# Altium PCB 400432.PcbDoc (part 1 of 7)
Units mm, origin at the board's own origin, x right, y up, seen from the top; angles counter-clockwise.
Board outline 136.53 x 63.5 mm, 4 copper layers (Top Layer, Mid-Layer 1, Mid-Layer 2, Bottom Layer), stack 1.505 mm thick; 354 components, 245 nets, 1470 pads, 1957 vias.
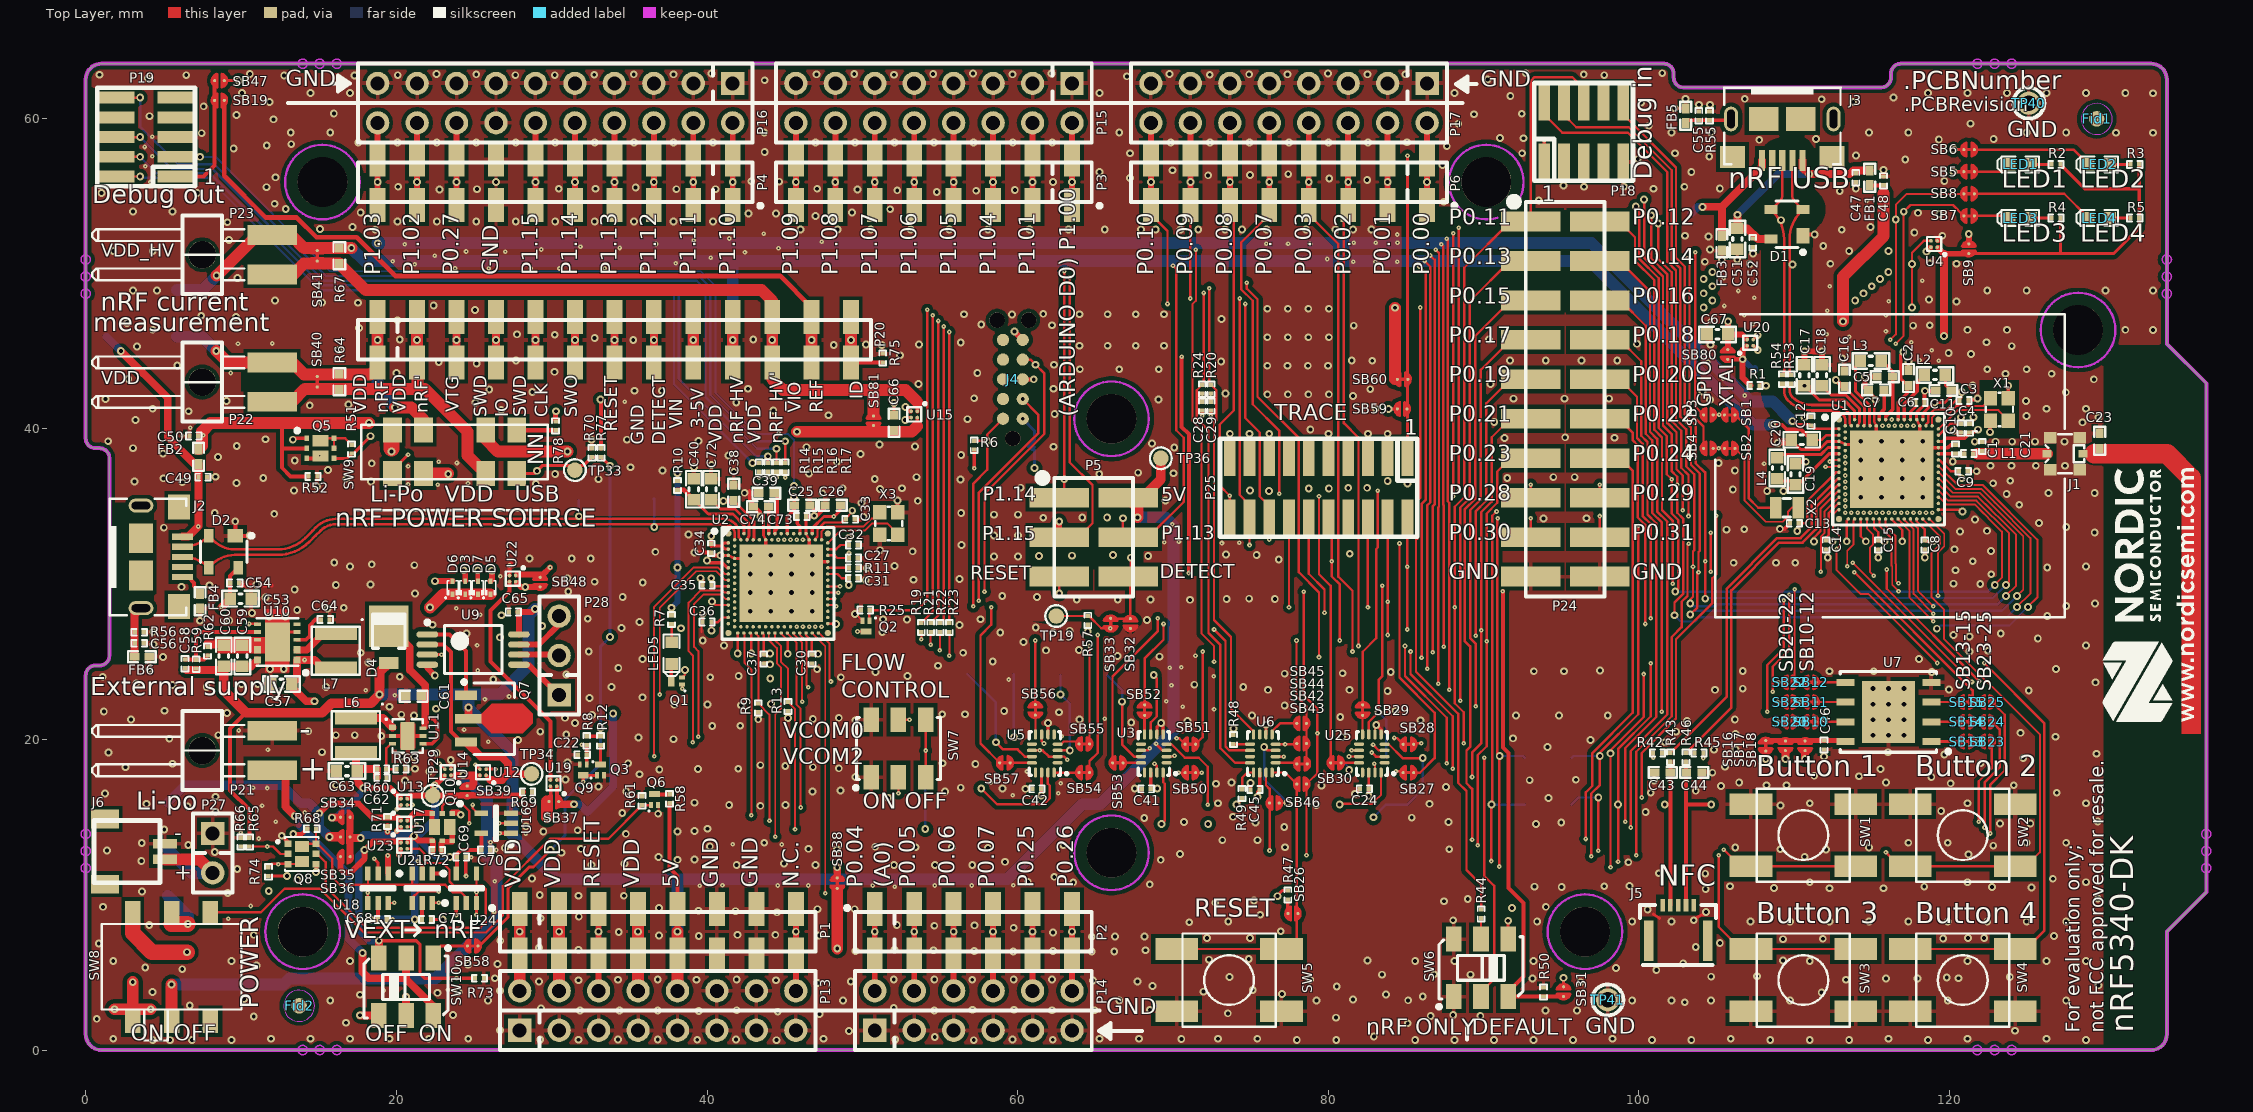
[diagram p0: Top Layer view]
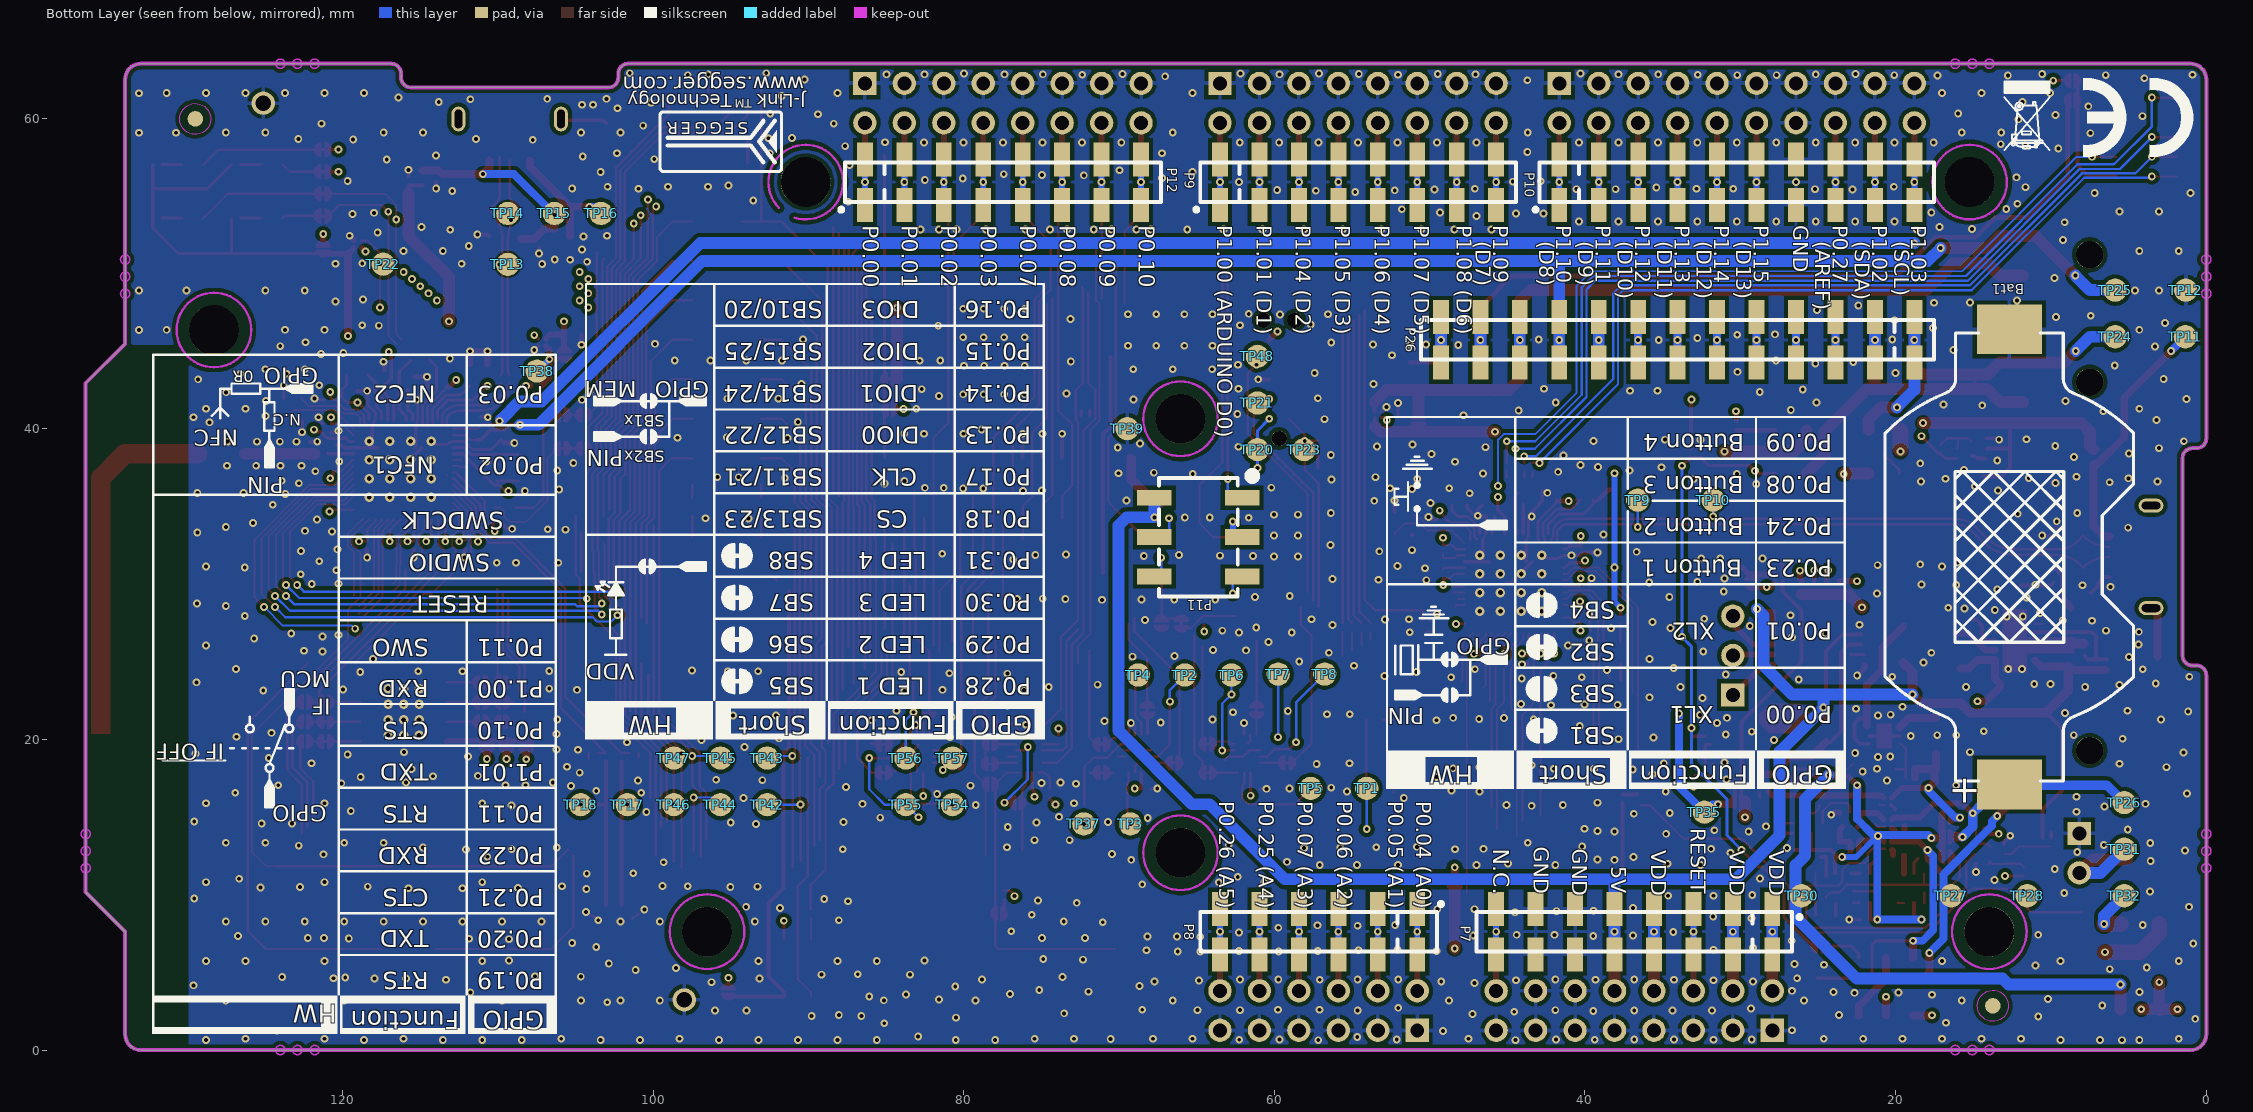
[diagram p1: Bottom Layer view, seen from below]
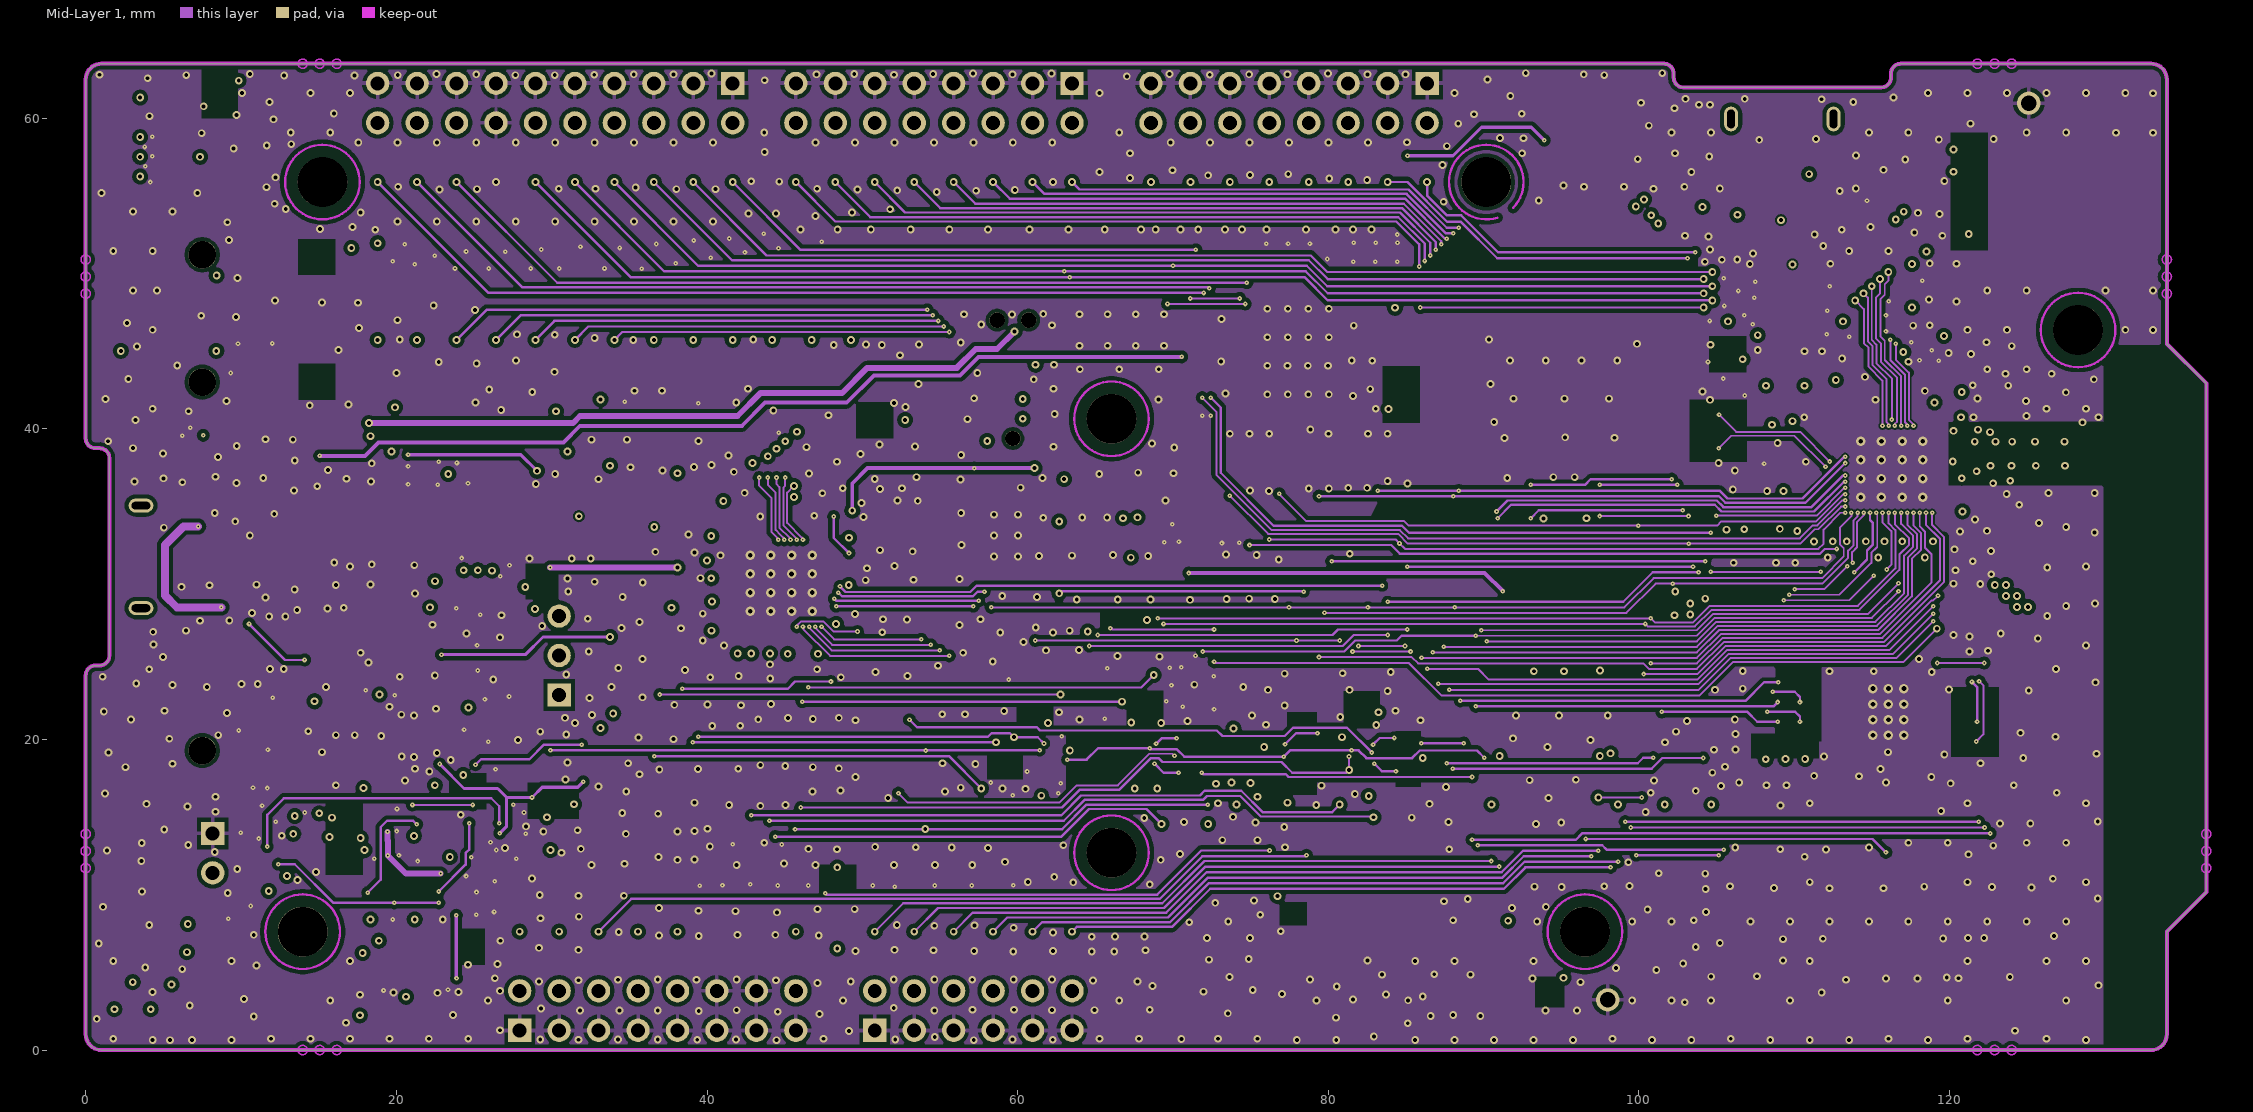
[diagram p2: Mid-Layer 1]
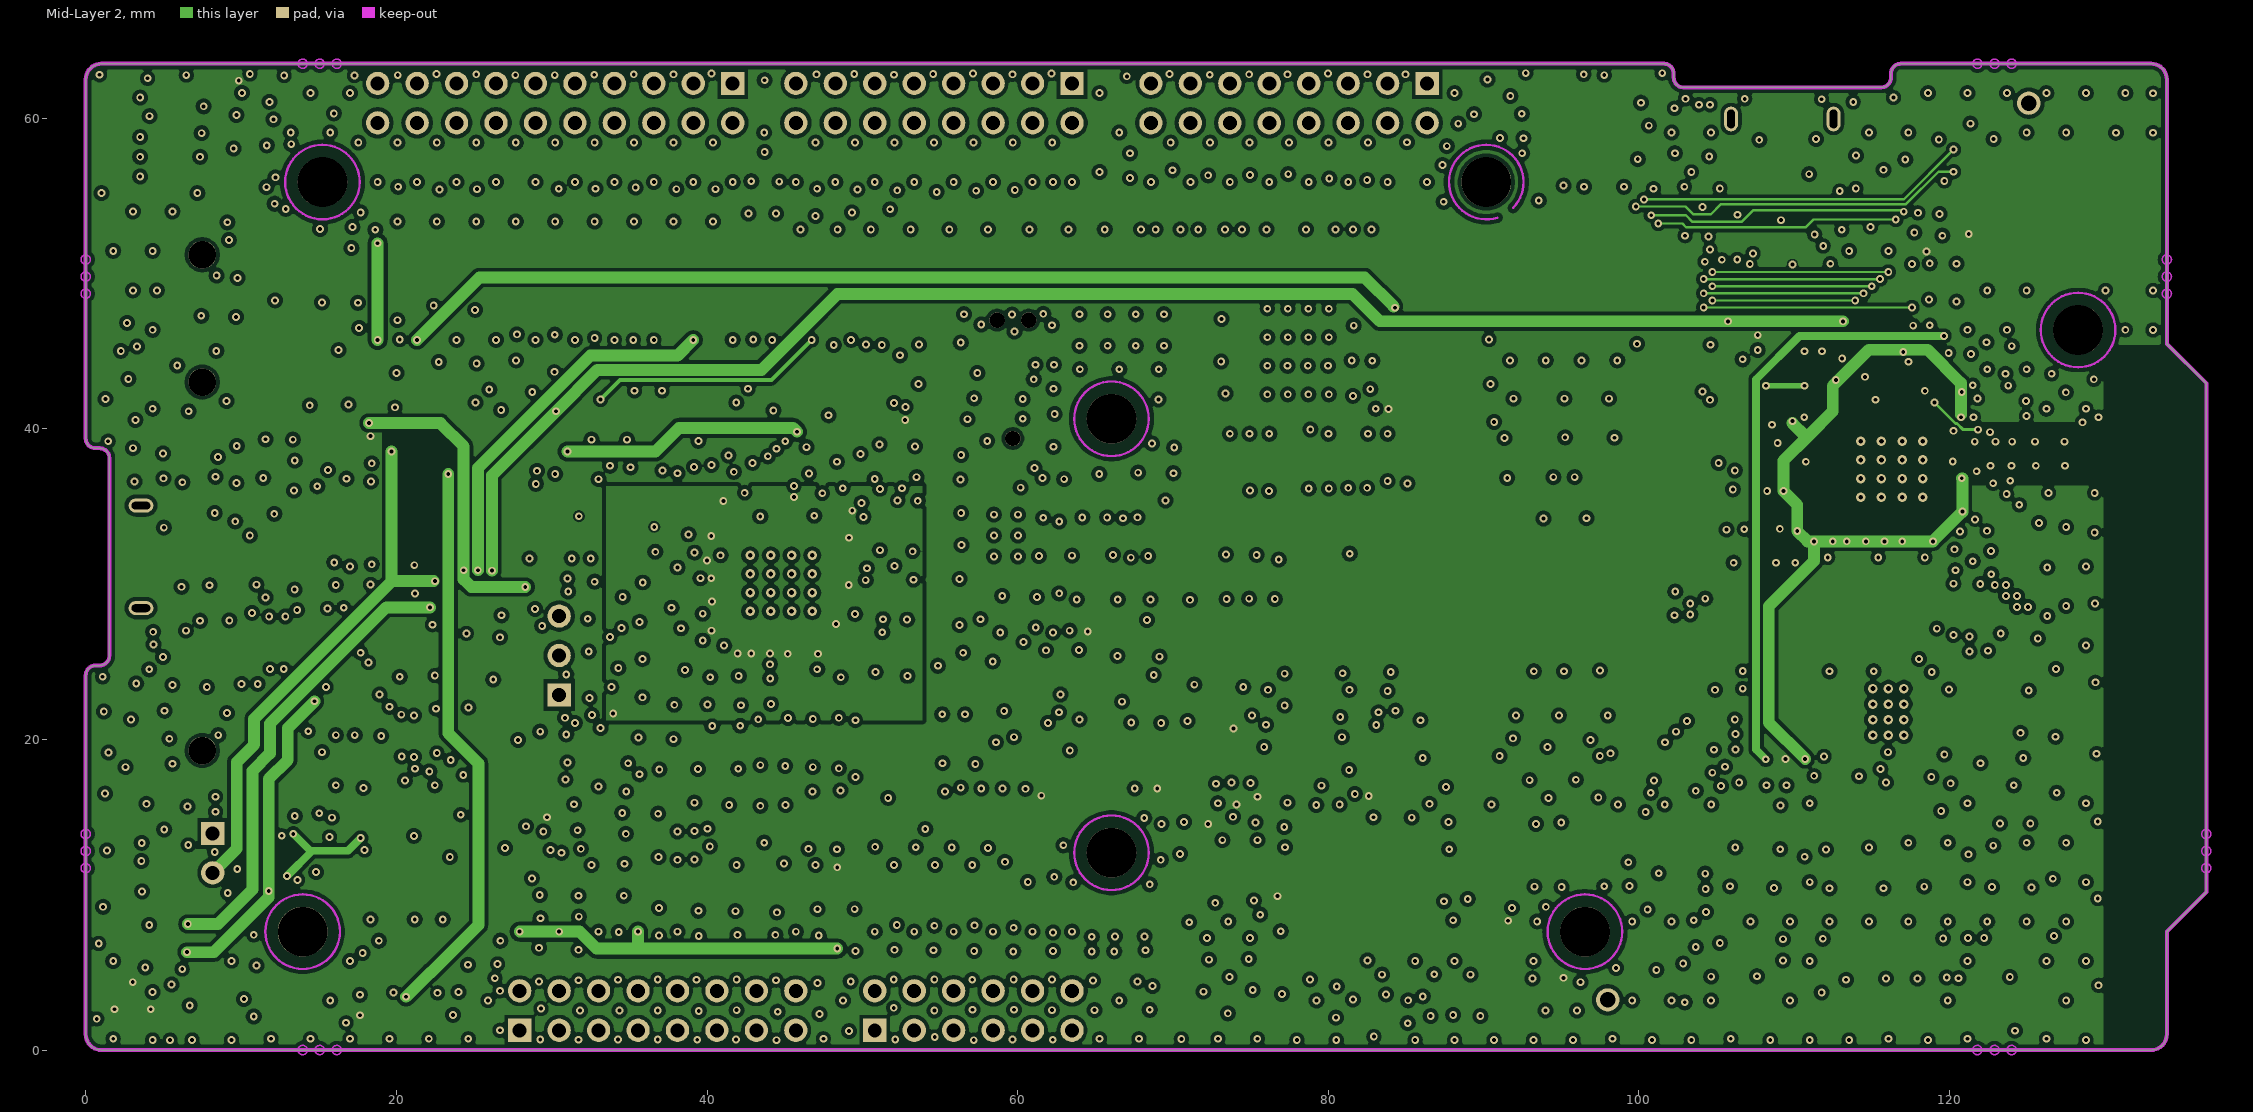
[diagram p3: Mid-Layer 2]
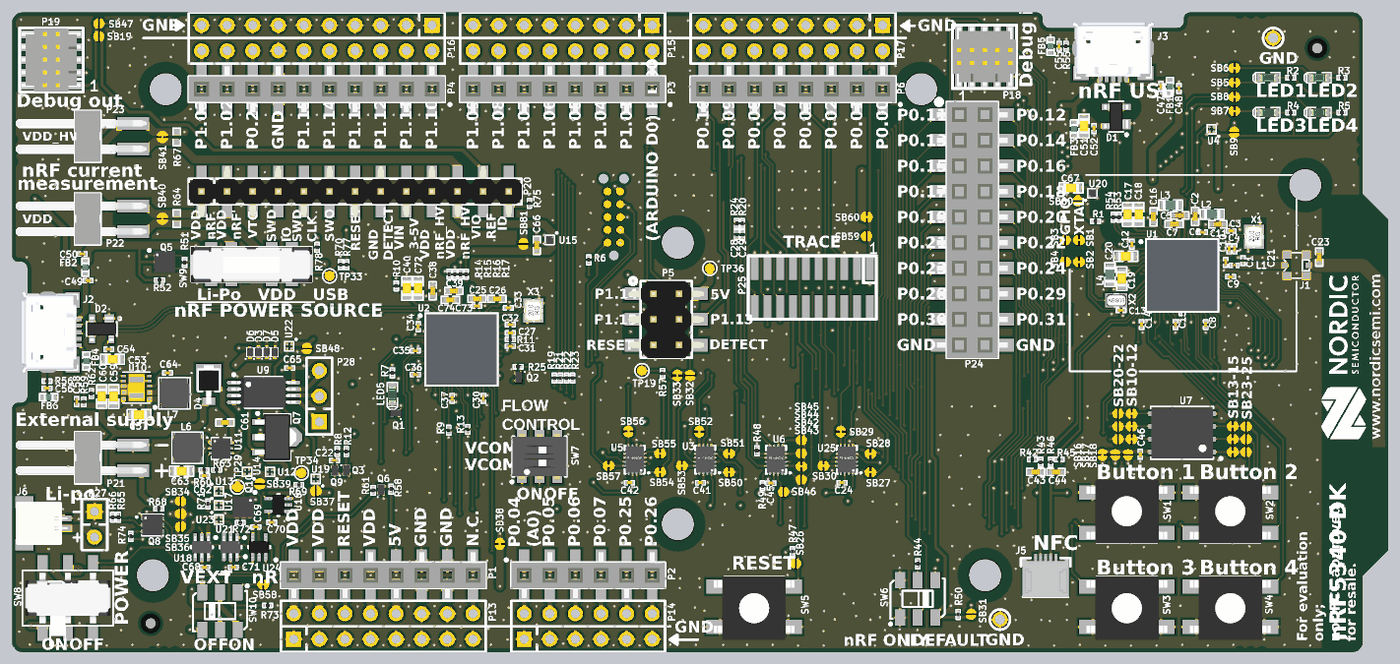
[diagram p9: 3D render of the assembled board from above, using the file's embedded part models]

## Layer stack, top to bottom
Top Solder: solder mask 0.0475, Solder Resist, Dk 3.5
Top Layer: signal copper 0.0175
Dielectric1: prepreg 0.1, FR-4, Dk 3.72
Mid-Layer 1: signal copper 0.035
Dielectric2: core 1.2, FR-4, Dk 3.72
Mid-Layer 2: signal copper 0.035
Dielectric3: prepreg 0.1, FR-4, Dk 3.72
Bottom Layer: signal copper 0.0175
Bottom Solder: solder mask 0.0475, Solder Resist, Dk 3.5

## Board outline
0,1.016 0,24.12 cw(c0.635,24.12) 0.635,24.755 0.889,24.755 ccw(c0.889,25.39) 1.524,25.39 1.524,38.11 ccw(c0.889,38.11) 0.889,38.745 0.635,38.745 cw(c0.635,39.38) 0,39.38 0,62.484 cw(c1.016,62.484) 1.016,63.5 101.599,63.5 cw(c101.599,62.865) 102.234,62.865 102.234,62.611 ccw(c102.869,62.611) 102.869,61.976 115.589,61.976 ccw(c115.589,62.611) 116.224,62.611 116.224,62.865 cw(c116.859,62.865) 116.859,63.5 132.969,63.5 cw(c132.969,62.484) 133.985,62.484 133.985,45.466 136.525,42.926 136.525,10.16 133.985,7.62 133.985,1.016 cw(c132.969,1.016) 132.969,0 97.36,0 82.099,0 1.016,0 cw(c1.016,1.016)

## Design rules (kind name [scope] priority, off if disabled: settings)
Clearance Microvia_Clearance [AsMM(ViaDiameter) = 0.3 vs AsMM(ViaDiameter) = 0.3] p1: gap=0.1 ignorepadtopadclearanceinfootprint=FALSE
Clearance U1_Clearance [InRegionRelative(4428, 1328, 4700, 1611) vs OnTopLayer or OnLayer('Mid-Layer 1')] p2: gap=0.102 ignorepadtopadclearanceinfootprint=FALSE except(0: Arc-Hole Track-Hole SMDPad-Hole THPad-Hole Via-Hole Fill-Hole Poly-Hole Region-Hole Text-Hole)
Clearance USB_Poly_Clearance [InNamedPolygon('Top Layer-GND') vs (IsTrack or IsArc) and (InDifferentialPair('DHSD') or InDifferentialPair('USB0') or                          InDifferentialPair('D') or InDifferentialPair('D*'))] p3: gap=1.397 ignorepadtopadclearanceinfootprint=FALSE
Clearance "NPTH clearance" [Not PadIsPlated And HoleSize > 0] p4: gap=0.229 ignorepadtopadclearanceinfootprint=FALSE except(0: Arc-Hole Track-Hole SMDPad-Hole THPad-Hole Via-Hole Fill-Hole Poly-Hole Region-Hole Text-Hole)
Clearance USB_Clearance [(InDifferentialPairClass('All Differential Pairs'))] p5: gap=0.125 ignorepadtopadclearanceinfootprint=FALSE except(0: Arc-Hole Track-Hole SMDPad-Hole THPad-Hole Via-Hole Fill-Hole Poly-Hole Region-Hole Text-Hole)
Clearance ANT_Clerance [InNet('RF') or InNet('ANT')] p6: gap=0.127 ignorepadtopadclearanceinfootprint=FALSE
Clearance Polygon_Clearance [(InNamedPolygon('Top Layer-GND')) or (InNamedPolygon('Mid_Layer_1-GND')) or (InNamedPolygon('Mid_Layer_2-VDD')) or (InNamedPolygon('Mid_Layer_2-VDD_SAM') or InNamedPolygon('Bottom_Layer-GND'))] p7: gap=0.254 ignorepadtopadclearanceinfootprint=FALSE except(0: Arc-Hole Track-Hole SMDPad-Hole THPad-Hole Via-Hole Fill-Hole Poly-Hole Region-Hole Text-Hole)
Clearance SB_Clearance [HasFootprint('Solderbridge') or HasFootprint('QFN40P180X140X55-10N')] p8: gap=0.127 ignorepadtopadclearanceinfootprint=FALSE except(0: Arc-Hole Track-Hole SMDPad-Hole THPad-Hole Via-Hole Fill-Hole Poly-Hole Region-Hole Text-Hole)
Clearance CSP_Clearance [HasFootprint('BGA4C40P2X2_76X76X62')] p9: gap=0.127 ignorepadtopadclearanceinfootprint=FALSE except(0: Arc-Hole Track-Hole SMDPad-Hole THPad-Hole Via-Hole Fill-Hole Poly-Hole Region-Hole Text-Hole)
Clearance P23_Clearance [HasFootprint('FPC_05P-0.5mm-RA-SMD')] p10: gap=0.127 ignorepadtopadclearanceinfootprint=FALSE except(0: Arc-Hole Track-Hole SMDPad-Hole THPad-Hole Via-Hole Fill-Hole Poly-Hole Region-Hole Text-Hole)
Clearance PSON35P100X50-8N_Clearance [HasFootprint('PSON35P100X50-8N')] p11: gap=0.15 ignorepadtopadclearanceinfootprint=FALSE except(0: Arc-Hole Track-Hole SMDPad-Hole THPad-Hole Via-Hole Fill-Hole Poly-Hole Region-Hole Text-Hole)
Clearance Top_layer_Clearance [All vs OnLayer('Top Layer')] p12: gap=0.125 ignorepadtopadclearanceinfootprint=FALSE
Clearance [All] p13: gap=0.125 ignorepadtopadclearanceinfootprint=FALSE except(0: Arc-Hole Track-Hole SMDPad-Hole THPad-Hole Via-Hole Fill-Hole Poly-Hole Region-Hole Text-Hole)
ComponentClearance [All] p1 off: gap=0.254 collisioncheckmode=3 verticalgap=0.254 showdistances=FALSE
DiffPairsRouting [All] p1: maxlimit=0.193 minlimit=0.191 mostfreqgap=0.193 toplayer_minwidth=0.15 toplayer_maxwidth=0.165 toplayer_prefwidth=0.165 midlayer1_minwidth=0.15 midlayer1_maxwidth=0.165 midlayer1_prefwidth=0.165 midlayer2_minwidth=0.15 midlayer2_maxwidth=0.165 midlayer2_prefwidth=0.165 bottomlayer_minwidth=0.15 bottomlayer_maxwidth=0.165 bottomlayer_prefwidth=0.165 maxuncoupledlength=12.7
FabricationTestPointUsage TestPointUsage [All] p1: valid=0 allowmultiple=FALSE
FabricationTestpoint Testpoint [All] p1: side=3 testpointundercomponent=TRUE minsize=1.016 maxsize=2.54 preferedsize=1.524 minholesize=0 maxholesize=1.016 preferedholesize=0.813 testpointgrid=0.025 allowsidetop=TRUE allowsidebottom=TRUE usegrid=TRUE gridtolerance=0
Height [All] p1 off: minheight=0 maxheight=25.4 prefheight=12.7
HoleSize [All] p1: absolutevalues=TRUE maxlimit=5 minlimit=0.1 maxpercent=80.000 minpercent=20.000
HoleToHoleClearance HoleToHoleClearance_L1L2 [InDrillLayerPair('Top Layer - Mid-Layer 1') vs InDrillLayerPair('Top Layer - Mid-Layer 1')] p1: gap=0.225 allowstackedmicrovias=TRUE
HoleToHoleClearance HoleToHoleClearance_L1L2_L1L3 [InDrillLayerPair('Top Layer - Mid-Layer 1') vs InDrillLayerPair('Top Layer - Mid-Layer 2')] p2: gap=0.225 allowstackedmicrovias=TRUE
HoleToHoleClearance HoleToHoleClearance_L1L3 [InDrillLayerPair('Top Layer - Mid-Layer 2') vs InDrillLayerPair('Top Layer - Mid-Layer 2')] p3: gap=0.225 allowstackedmicrovias=TRUE
HoleToHoleClearance HoleToHoleClearance_L1L3_L3L4 [InDrillLayerPair('Top Layer - Mid-Layer 2') vs InDrillLayerPair('Mid-Layer 2 - Mid-Layer 3')] p4: gap=0.225 allowstackedmicrovias=TRUE
HoleToHoleClearance HoleToHoleClearance_L3L4 [InDrillLayerPair('Mid-Layer 2 - Mid-Layer 3') vs InDrillLayerPair('Mid-Layer 2 - Mid-Layer 3')] p5: gap=0.225 allowstackedmicrovias=TRUE
HoleToHoleClearance HoleToHoleClearance_L3L4_L4L6 [InDrillLayerPair('Mid-Layer 2 - Mid-Layer 3') vs InDrillLayerPair('Mid-Layer 3 - Bottom Layer')] p6: gap=0.225 allowstackedmicrovias=TRUE
HoleToHoleClearance HoleToHoleClearance_L4L6 [InDrillLayerPair('Mid-Layer 3 - Bottom Layer') vs InDrillLayerPair('Mid-Layer 3 - Bottom Layer')] p7: gap=0.225 allowstackedmicrovias=TRUE
HoleToHoleClearance HoleToHoleClearance_L1L2_L1L6 [InDrillLayerPair('Top Layer - Mid-Layer 1') vs InDrillLayerPair('Top Layer - Bottom Layer')] p8: gap=0.275 allowstackedmicrovias=FALSE
HoleToHoleClearance HoleToHoleClearance_L1L3_L1L6 [InDrillLayerPair('Top Layer - Mid-Layer 2') vs InDrillLayerPair('Top Layer - Bottom Layer')] p9: gap=0.275 allowstackedmicrovias=FALSE
HoleToHoleClearance HoleToHoleClearance_L3L4_L1L6 [InDrillLayerPair('Mid-Layer 2 - Mid-Layer 3') vs InDrillLayerPair('Top Layer - Bottom Layer')] p10: gap=0.275 allowstackedmicrovias=FALSE
HoleToHoleClearance HoleToHoleClearance_L4L6_L1L6 [InDrillLayerPair('Mid-Layer 3 - Bottom Layer') vs InDrillLayerPair('Top Layer - Bottom Layer')] p11: gap=0.275 allowstackedmicrovias=FALSE
HoleToHoleClearance HoleToHoleClearance_L1L6 [InDrillLayerPair('Top Layer - Bottom Layer') vs InDrillLayerPair('Top Layer - Bottom Layer')] p12: gap=0.45 allowstackedmicrovias=FALSE
HoleToHoleClearance [All] p13: gap=0.254 allowstackedmicrovias=TRUE
MinimumAnnularRing [All] p1 off: minimumring=0.152
MinimumSolderMaskSliver MinimumSolderMaskSliver_exception [InComponent('U1') or InComponent('u2') or InComponent('U10') or HasFootprint('BGA4C40P2X2_76X76X62')] p1: minsoldermaskwidth=0.064
MinimumSolderMaskSliver [All] p2: minsoldermaskwidth=0.09
NetAntennae NetAntennae_ANT [InNet('ANT')] p1: netantennaetolerance=40
NetAntennae [All] p2: netantennaetolerance=0
PolygonConnect PolygonConnect_1 [isVia and innet(gnd) or isVia and innet('VDD') or HasFootprint('COAXIAL-SWF') or isVia and innet('VDD_SAM') or IsVia and InNet('VDD_IMCU')] p1: connectstyle=Direct reliefconductorwidth=0.254 reliefentries=4 polygonreliefangle="90 Angle" airgapwidth=0.254
PolygonConnect [All] p2: connectstyle=Relief reliefconductorwidth=0.254 reliefentries=4 polygonreliefangle="90 Angle" airgapwidth=0.254
RoutingVias [All] p1: holewidth=0.25 width=0.5 viastyle="Through Hole" minholewidth=0.1 minwidth=0.3 maxholewidth=0.305 maxwidth=0.61 useviatemplates=TRUE viatemplateguid#1={9961AA3A-8CFC-44F9-8DAD-0443DB35AFF9} viatemplateguid#2={C26054F7-27DB-47C4-85BE-AE7BAE02D57D} viatemplatename#1=v50h25m0mx0 viatemplatename#2=v30h10m0
SilkToSolderMaskClearance SilkscreenOverComponentPads [IsPad] p1: minsilkscreentomaskgap=0.254 clearancetoexposedcopper=TRUE
SolderMaskExpansion [IsVia] p1: expansion=0.076 istentingtop=TRUE
SolderMaskExpansion SolderMaskExpansion_1 [All] p2: expansion=0.076 istentingtop=FALSE
UnpouredPolygon [All] p1 off:
Width Width_Diff [(InDifferentialPairClass('All Differential Pairs'))] p1: maxlimit=0.165 minlimit=0.15 preferedwidth=0.165
Width [All] p2: maxlimit=10.16 minlimit=0.102 preferedwidth=0.152 minimp=50.000000 maximp=50.000000 favimp=50.000000
19 further rules are at their usual default settings.

## Classes and differential pairs
component class pca10095_sheet6_power_supply: Bat1 C22 C57 C58 C59 C60 C61 C62 C63 C64 C65 C66 C67 C68 C69 C70 C71 D3 D4 D5 D6 D7 L6 L7 P21 P22 P23 ps Q3 Q6 Q7 Q8 Q9 Q10 R8 R12 R58 R59 R60 R61 R62 R63 R64 R65 R66 R67 R68 R69 R70 R71 R72 R73 R74 R77 R78 SB34 SB35 SB36 SB37 SB38 SB39 SB40 SB41 SB48 SB58 SB80 SB81 SW8 SW9 SW10 TP24 TP25 TP26 TP27 TP28 TP29 TP30 TP32 TP33 TP34 TP35 TP36 TP37 TP38 TP39 TP40 TP41 U9 U10 U11 U12 U13 U14 U15 U16 U17 U18 U19 U20 U21 U22 U23 U24
component class pca10095_sheet5_connectors: C47 C48 C49 C50 C51 C52 C53 C54 C55 C56 D1 D2 FB1 FB2 FB3 FB4 FB5 FB6 J2 J3 J5 J6 P1 P2 P3 P4 P5 P6 P7 P8 P9 P10 P11 P12 P13 P14 P15 P16 P17 P18 P19 P20 P24 P25 P26 P27 R53 R54 R55 R56 R57 R75 SB19 SB32 SB33 SB47 SB59 SB60 TP9 TP10 TP11 TP12 TP13 TP14 TP15 TP16 TP17 TP18 TP19 TP31 TP42 TP43 TP44 TP45 TP46 TP47
component class pca10095_sheet4_misc: C24 C41 C42 C43 C44 C45 C46 LED1 LED2 LED3 LED4 P28 Q5 R2 R3 R4 R5 R43 R44 R46 R47 R48 R49 R50 R51 R52 SB5 SB6 SB7 SB8 SB9 SB16 SB17 SB18 SB26 SB27 SB28 SB29 SB30 SB31 SB42 SB43 SB44 SB45 SB46 SB50 SB51 SB52 SB53 SB54 SB55 SB56 SB57 SW1 SW2 SW3 SW4 SW5 SW6 SW7 TP1 TP2 TP3 TP4 TP5 TP6 TP7 TP8 TP22 TP54 TP55 TP56 TP57 U3 U4 U5 U6 U7 U25
component class pca10095_sheet3_interface_mcu: C25 C26 C27 C30 C31 C32 C33 C34 C35 C36 C37 C38 C39 C40 C72 C73 C74 J4 LED5 Q1 Q2 R6 R7 R9 R10 R11 R13 R14 R15 R16 R17 R19 R21 R22 R23 R25 TP20 TP21 TP23 TP48 U2 X3
component class pca10095_sheet2_nrf5340_mcu: C1 C2 C3 C4 C5 C6 C7 C8 C9 C10 C11 C12 C13 C14 C15 C16 C17 C18 C19 C20 C21 C23 C28 C29 J1 L1 L2 L3 L4 R1 R20 R24 R42 R45 SB1 SB2 SB3 SB4 SB10 SB11 SB12 SB13 SB14 SB15 SB20 SB21 SB22 SB23 SB24 SB25 U1 X1 X2
component class pca10095_sheet1_cover: Fid1 Fid2
differential pair IMCU: +IMCU_P -IMCU_N
differential pair D*: +D*_P -D*_N
differential pair D: +D_P -D_N

## Components (designator, comment, footprint, x,y, rotation, side; value= is the part's Value field where it differs from the comment)
Bat1 "Bat Holder CR2032" L-KLS5-CR2032-23-B1 12.675,31.75 r90 bottom
C1 "0.7pF" CAPC0603X03L_C#1 120.378,38.689 r270 top
C2 "1.0µF" CAPC1005X04L 117.353,43.264 r90 top
C3 "1.0µF" CAPC1005X04L 119.603,42.464 r0 top
C4 "2.2nF" CAPC0603X03L_C#1 121.278,40.039 r90 top
C5 "1.0µF" CAPC1005X04L 115.828,43.344 r0 top
C6 "100nF" CAPC0603X03L_C#1 118.097,41.689 r0 top
C7 "1.0µF" CAPC1005X04L 115.278,42.494 r0 top
C8 "100nF" CAPC0603X03L_C#2 118.403,32.514 r270 top
C9 "100nF" CAPC0603X03L_C#1 120.879,37.262 r0 top
C10 "100nF" CAPC0603X03L_C#1 120.728,40.039 r270 top
C11 "100nF" CAPC0603X03L_C#1 120.928,41.813 r0 top
C12 "100nF" CAPC0603X03L_C#1 111.078,40.489 r90 top
C13 "100nF" CAPC0603X03L_C#2 110.003,33.914 r180 top
C14 "100nF" CAPC0603X03L_C#2 112.051,32.514 r270 top
C15 "100nF" CAPC0603X03L_C#2 115.404,32.514 r270 top
C16 "1.0µF" CAPC1005X04L 113.228,43.214 r270 top
C17 "4.7µF" CAPC1608X06L 110.653,43.444 r90 top
C18 "4.7µF" CAPC1608X06L 111.778,43.444 r90 top
C19 "2.2µF" CAPC1608X06L 110.078,37.064 r90 top
C20 "4.7µF" CAPC1608X06L 110.478,39.289 r180 top
C21 "N.C." CAPC0603X03L_C_NC 122.098,38.856 r270 top
C22 "10nF" CAPC0603X03L_C#1 31.969,19.015 r180 top
C23 "1.2pF" CAPC1005X04L 129.667,39.218 r90 top
C24 "100nF" CAPC0603X03L_C#1 82.321,16.815 r0 top
C25 "1.0µF" CAPC1005X04L 46.126,35.073 r0 top
C26 "1.0µF" CAPC1005X04L 48.101,35.073 r0 top
C27 "2.2nF" CAPC0603X03L_C#2 49.426,31.674 r0 top
C28 "N.C." CAPC0603X03L_C_NC 71.882,41.453 r90 top
C29 "N.C." CAPC0603X03L_C_NC 72.441,41.453 r90 top
C30 "100nF" CAPC0603X03L_C#2 46.751,25.173 r270 top
C31 "100nF" CAPC0603X03L_C#2 49.426,30.373 r0 top
C32 "100nF" CAPC0603X03L_C#2 49.426,32.512 r0 top
C33 "100nF" CAPC0603X03L_C#2 49.226,34.165 r0 top
C34 "100nF" CAPC0603X03L_C#2 40.276,32.298 r270 top
C35 "100nF" CAPC0603X03L_C#2 40.001,29.923 r180 top
C36 "100nF" CAPC0603X03L_C#2 40.001,27.548 r180 top
C37 "100nF" CAPC0603X03L_C#2 43.653,25.173 r270 top
C38 "1.0µF" CAPC1005X04L 41.726,35.873 r270 top
C39 "1.0µF" CAPC1005X04L 43.826,35.853 r0 top
C40 "4.7µF" CAPC1608X06L 39.151,36.103 r90 top
C41 "100nF" CAPC0603X03L_C#1 68.284,16.815 r0 top
C42 "100nF" CAPC0603X03L_C#1 61.239,16.815 r0 top
C43 "300pF" CAPC1005X04L 101.524,17.875 r180 top
C44 "300pF" CAPC1005X04L 103.556,17.875 r180 top
C45 "100nF" CAPC0603X03L_C#1 75.277,16.764 r0 top
C46 "100nF" CAPC0603X03L_C#1 111.92,19.634 r90 top
C47 "10nF" CAPC0603X03L_C#1 113.963,56.159 r90 top
C48 "100nF" CAPC0603X03L_C#1 115.748,55.956 r270 top
C49 "10nF" CAPC0603X03L_C#1 7.544,36.881 r0 top
C50 "100nF" CAPC0603X03L_C#1 6.96,39.522 r0 top
C51 "1.0µF" CAPC1608X06L 106.335,52.222 r90 top
C52 "100nF" CAPC0603X03L_C#1 107.326,51.968 r90 top
C53 "1.0µF" CAPC1608X06L 9.972,29.058 r180 top
C54 "100nF" CAPC0603X03L_C#1 9.591,30.074 r180 top
C55 "100nF" CAPC0603X03L_C#1 103.854,60.145 r270 top
C56 "100nF" CAPC0603X03L_C#1 3.45,26.187 r180 top
C57 "10µF" CAPC1608X06L 12.598,23.571 r0 top
C58 "15pF" CAPC0603X03L_C#1 6.401,24.867 r270 top
C59 "10µF" CAPC1608X06L 10.084,25.375 r270 top
C60 "10µF" CAPC1608X06L 8.89,25.375 r270 top
C61 "4.7µF" CAPC1005X04L 21.107,22.784 r0 top
C62 "150pF" CAPC0603X03L_C#1 19.075,17.526 r180 top
C63 "10µF" CAPC1608X06L 16.815,17.958 r0 top
C64 "470nF" CAPC0603X03L_C#1 15.418,27.711 r180 top
C65 "100nF" CAPC0603X03L_C#1 27.534,28.194 r0 top
C66 "1.0µF" CAPC1005X04L 52.045,40.386 r270 top
C67 "1.0µF" CAPC1608X06L 105.054,46.076 r0 top
C68 "100nF" CAPC0603X03L_C#1 19.101,8.407 r180 top
C69 "100nF" CAPC0603X03L_C#1 24.181,12.421 r180 top
C70 "100nF" CAPC0603X03L_C#1 25.756,12.878 r180 top
C71 "100nF" CAPC0603X03L_C#1 21.946,8.407 r180 top
C72 "4.7µF" CAPC1608X06L 40.276,36.103 r90 top
C73 "100nF" CAPC0603X03L_C#2 46.095,34.348 r0 top
C74 "1.0µF" CAPC1005X04L 43.476,34.978 r0 top
D1 "PRTR5V0U2X" SOT190P230X110-4L 109.531,53.16 r180 top
D2 "PRTR5V0U2X" SOT190P230X110-4L 8.88,32.08 r270 top
D3 "NSR0620P2T5G" SODFL100X40-2N 24.435,29.766 r90 top
D4 "MBRM110E" DO-216AA 19.507,26.568 r270 top
D5 "NSR0620P2T5G" SODFL100X40-2N 26.06,29.766 r90 top
D6 "NSR0620P2T5G" SODFL100X40-2N 23.622,29.766 r90 top
D7 "NSR0620P2T5G" SODFL100X40-2N 25.248,29.766 r90 top
FB1 "120R/0.55A" INDC1005X04L 114.852,56.159 r270 top
FB2 "120R/0.55A" INDC1005X04L 7.264,38.202 r90 top
FB3 "120R/0.55A" INDC1005X04L 105.345,51.942 r270 top
FB4 "120R/0.55A" INDC1005X04L 7.366,28.898 r270 top
FB5 "120R/0.55A" INDC1005X04L 103.016,60.145 r90 top
FB6 "120R/0.55A" INDC1005X04L 3.621,25.317 r0 top
Fid1 "Fiducial mark" Fiducial 129.471,59.944 r180 top
Fid2 "Fiducial mark" Fiducial 13.743,2.845 r0 top
J1 "MM8130-2600" COAXIAL-SWF 127.423,38.391 r90 top
J2 "MicroUSB-B" USB-Micro-B-RA-SMD-PiP 6.232,31.75 r0 top
J3 "MicroUSB-B" USB-Micro-B-RA-SMD-PiP 109.229,57.268 r270 top
J4 "TC2050-IDC" TC2050-IDC-NLFP 59.69,43.18 r90 top
J5 "FPC 0.5mm RA SMD" FPC_05P-0.5mm-RA-SMD 101.524,9.328 r0 top
J6 "HDR-2, 1mm" SM02B-SRSS-TB 5.105,12.776 r270 top
L1 "2.2nH" INDC0603X03L_C 121.226,38.397 r0 top
L2 "10µH" INDC1608X06L 119.053,43.464 r180 top
L3 "10µH" INDC1608X06L 114.928,44.364 r180 top
L4 "10µH" INDC1608X06L 108.903,37.464 r90 top
L6 "4.7µH" TY-NR3015 17.399,20.269 r270 top
L7 "2.2µH" TY-NR3015 16.104,25.705 r270 top
LED1 "L0603G" LED_0603_G 124.557,57.016 r0 top
LED2 "L0603G" LED_0603_G 129.637,57.016 r0 top
LED3 "L0603G" LED_0603_G 124.557,53.562 r0 top
LED4 "L0603G" LED_0603_G 129.637,53.562 r0 top
LED5 "L0603G" LED_0603_G 37.719,25.552 r90 top
P1 "Socket 1x8" SOCKET_1x8_SMD 27.94,7.62 r0 top locked
P2 "Socket 1x6" SOCKET_1x6_SMD 50.8,7.62 r0 top locked
P3 "Socket 1x8" SOCKET_1x8_SMD 63.5,55.88 r180 top locked
P4 "Socket 1x10" SOCKET_1x10_SMD 41.656,55.88 r180 top locked
P5 "Pin Hdr 2x3" HDR_2x3-SMD 64.897,33.02 r270 top locked
P6 "Socket 1x8" SOCKET_1x8_SMD 86.36,55.88 r180 top locked
P7 "Pin List 1x8" LIST_1x8_SMD-NC 27.94,7.62 r0 bottom locked
P8 "Pin List 1x6" LIST_1x6_SMD-NC 50.8,7.62 r0 bottom locked
P9 "Pin List 1x8" LIST_1x8_SMD-NC 63.5,55.88 r180 bottom locked
P10 "Pin List 1x10" LIST_1x10_SMD-NC 41.656,55.88 r180 bottom locked
P11 "Socket 2x3" SOCKET_2x3_SMD-2.54mm-bottom-NC 64.897,33.02 r270 top locked
P12 "Pin List 1x8" LIST_1x8_SMD-NC 86.36,55.88 r180 bottom locked
P13 "Pin Header 2x8" HDR_2x8-NC 36.83,2.54 r0 top locked
P14 "Pin Header 2x6" HDR_2x6-NC 57.15,2.54 r0 top locked
P15 "Pin Header 2x8" HDR_2x8-NC 54.61,60.96 r180 top locked
P16 "Pin Header 2x10" HDR_2x10-NC 30.226,60.96 r180 top locked
P17 "Pin Header 2x8" HDR_2x8-NC 77.47,60.96 r180 top locked
P18 "Pin Header 2x5, 1.27mm" HDR_2x5-SMD-1.27mm-K 96.444,59.106 r0 top
P19 "Pin Header 2x5, 1.27mm" HDR_2x5-SMD-1.27mm-K 3.886,58.776 r90 top
P20 "Pin List 1x13" LIST_1x13_SMD 18.796,45.72 r0 top locked
P21 "Pin List 1x2, Angled" LIST_ANG_1x2-SMD-2.54MM 12,19.279 r270 top
P22 "Pin List 1x2, Angled" LIST_ANG_1x2-SMD-2.54MM 12,43 r270 top
P23 "Pin List 1x2, Angled" LIST_ANG_1x2-SMD-2.54MM 12,51.2 r270 top
P24 "Socket 2x10" SOCKET_2x10_SMD-2.54mm 95.25,41.91 r270 top
P25 "Pin Header 2x10, 1.27mm" HDR_2x10-SMD-1.27mm-NC 79.375,36.195 r180 top locked
P26 "Socket 1x13" LIST_1x13_SMD-NC 18.796,45.72 r0 bottom locked
P27 "Pin List 1x2" LIST_1x2-NC 8.179,12.675 r270 top locked
P28 "Pin List 1x3" LIST_1x3-NC 30.48,25.4 r90 top locked
Q1 "RV2C010UNT2L" DFN65P100X40-3L 38.049,23.749 r180 top
Q2 "RV2C010UNT2L" DFN65P100X40-3L 50.228,27.286 r270 top
Q3 "RV2C010UNT2L" DFN65P100X40-3L 33.147,18.034 r90 top
Q5 "PMCPB5530" PMCPB5530X 15.113,38.735 r0 top
Q6 "RV2C010UNT2L" DFN65P100X40-3L 36.627,16.129 r90 top
Q7 "FCX690BTA" SOT89-150P409X160-3N 26.289,21.336 r0 top
Q8 "TSM250N02DCQ RFG" DFN65P200X200X80_HS-6N 13.919,12.624 r0 top
Q9 "RV2C010UNT2L" DFN65P100X40-3L 32.029,18.034 r270 top
Q10 "PMCPB5530" PMCPB5530X 22.951,14.356 r270 top
R1 "2R2" RESC0603X03L_C#1 107.467,42.774 r0 top
R2 "220R" RESC0603X03L_C#1 126.843,57.016 r0 top
R3 "220R" RESC0603X03L_C#1 131.923,57.016 r0 top
R4 "220R" RESC0603X03L_C#1 126.843,53.562 r0 top
R5 "220R" RESC0603X03L_C#1 131.923,53.562 r0 top
R6 "100k" RESC0603X03L_C#1 57.201,38.938 r270 top
R7 "560R" RESC0603X03L_C#1 37.719,27.711 r90 top
R8 "1M0" RESC0603X03L_C#1 32.258,19.914 r270 top
R9 "N.C." RESC0603X03L_C_NC 43.301,22.026 r270 top
R10 "2R2" RESC0603X03L_C#1 38.1,36.347 r270 top
R11 "49.9R" RESC0603X03L_C#1 49.426,31.039 r0 top
R12 "47k" RESC0603X03L_C#1 33.147,19.914 r270 top
R13 "N.C." RESC0603X03L_C_NC 45.216,22.113 r270 top
R14 "150R" RESC0603X03L_C#1 43.358,37.516 r90 top
R15 "150R" RESC0603X03L_C#1 43.917,37.516 r90 top
R16 "150R" RESC0603X03L_C#1 44.475,37.516 r90 top
R17 "150R" RESC0603X03L_C#1 45.034,37.516 r90 top
R19 "150R" RESC0603X03L_C#1 53.797,27.203 r90 top
R20 "0R" RESC0603X03L_C#2 72.441,42.545 r270 top
R21 "150R" RESC0603X03L_C#1 54.398,27.203 r90 top
R22 "150R" RESC0603X03L_C#1 54.999,27.203 r90 top
R23 "150R" RESC0603X03L_C#1 55.601,27.203 r90 top
R24 "0R" RESC0603X03L_C#2 71.882,42.545 r270 top
R25 "1M0" RESC0603X03L_C#1 50.19,28.321 r180 top
R42 "N.C." RESC0603X03L_C_NC 101.194,19.126 r0 top
R43 "0R" RESC0603X03L_C#1 102.022,18.848 r90 top
R44 "10k" RESC0603X03L_C#1 89.84,8.763 r270 top
R45 "N.C." RESC0603X03L_C_NC 103.861,19.126 r180 top
R46 "0R" RESC0603X03L_C#1 103.032,18.848 r90 top
R47 "100k" RESC0603X03L_C#1 77.394,9.982 r90 top
R48 "4k7" RESC0603X03L_C#1 73.889,19.99 r270 top
R49 "4k7" RESC0603X03L_C#1 74.447,16.51 r90 top
R50 "47k" RESC0603X03L_C#1 93.853,3.734 r90 top
R51 "1M0" RESC0603X03L_C#1 17.12,38.684 r90 top
R52 "150k" RESC0603X03L_C#1 14.63,36.932 r0 top
R53 "0R" RESC0603X03L_C#1 109.804,43.18 r90 top
R54 "0R" RESC0603X03L_C#1 109.245,43.18 r90 top
R55 "10k" RESC0603X03L_C#1 104.54,60.145 r270 top
R56 "10k" RESC0603X03L_C#1 3.45,26.899 r180 top
R57 "1M0" RESC0603X03L_C#1 64.516,27.661 r270 top
R58 "1k" RESC0603X03L_C#1 37.592,16.18 r90 top
R59 "270k" RESC0603X03L_C#1 7.112,24.841 r270 top
R60 "330k" RESC0603X03L_C#1 19.05,18.085 r180 top
R61 "10M" RESC0603X03L_C#1 35.814,16.053 r90 top
R62 "30k" RESC0603X03L_C#1 7.849,25.679 r270 top
R63 "120k" RESC0603X03L_C#1 20.295,18.085 r180 top
R64 "N.C." RESC1005X04L_NC 16.332,43.025 r90 top
R65 "820k" RESC0603X03L_C#1 10.538,13.386 r270 top
R66 "470k" RESC0603X03L_C#1 9.979,13.386 r90 top
R67 "N.C." RESC1005X04L_NC 16.332,51.13 r90 top
R68 "1M0" RESC0603X03L_C#1 14.554,14.249 r0 top
R69 "1M0" RESC0603X03L_C#1 28.448,16.612 r0 top
R70 "10M" RESC0603X03L_C#1 32.588,38.456 r90 top
R71 "100k" RESC0603X03L_C#1 19.431,14.707 r270 top
R72 "1M0" RESC0603X03L_C#1 22.631,12.852 r0 top
R73 "10M" RESC0603X03L_C#1 25.349,4.623 r0 top
R74 "1M0" RESC0603X03L_C#1 11.76,11.481 r90 top
R75 "205R" RESC0603X03L_C#1 51.308,44.552 r270 top
R77 "10k" RESC0603X03L_C#1 33.172,38.456 r90 top
R78 "4R7" RESC0603X03L_C#1 30.251,40.183 r270 top
SB1 "Solderbridge" Solderbridge_Shorted#1 105.842,40.894 r180 top net-tie
SB2 "Solderbridge" Solderbridge_Shorted#1 105.842,38.735 r180 top net-tie
SB3 "Solderbridge" Solderbridge#1 104.47,40.894 r180 top
SB4 "Solderbridge" Solderbridge#1 104.47,38.735 r180 top
SB5 "Solderbridge" Solderbridge_Shorted#1 121.251,56.547 r0 top net-tie
SB6 "Solderbridge" Solderbridge_Shorted#1 121.251,57.97 r0 top net-tie
SB7 "Solderbridge" Solderbridge_Shorted#1 121.251,53.702 r0 top net-tie
SB8 "Solderbridge" Solderbridge_Shorted#1 121.251,55.125 r0 top net-tie
SB9 "Solderbridge" Solderbridge#1 121.234,51.587 r270 top
SB10 "Solderbridge" Solderbridge_Shorted#1 111.056,21.133 r0 top net-tie
SB11 "Solderbridge" Solderbridge_Shorted#1 111.056,22.403 r0 top net-tie
SB12 "Solderbridge" Solderbridge_Shorted#1 111.056,23.673 r0 top net-tie
SB13 "Solderbridge" Solderbridge_Shorted#1 121.089,19.863 r180 top net-tie
SB14 "Solderbridge" Solderbridge_Shorted#1 121.089,21.133 r180 top net-tie
SB15 "Solderbridge" Solderbridge_Shorted#1 121.089,22.403 r180 top net-tie
SB16 "Solderbridge" Solderbridge_Shorted#1 108.161,19.583 r90 top net-tie
SB17 "Solderbridge" Solderbridge#1 109.431,19.583 r90 top
SB18 "Solderbridge" Solderbridge#2 110.701,19.583 r90 top
SB19 "Solderbridge" Solderbridge#3 8.611,61.138 r180 top
SB20 "Solderbridge" Solderbridge#4 109.71,21.133 r180 top
SB21 "Solderbridge" Solderbridge#4 109.71,22.403 r180 top
SB22 "Solderbridge" Solderbridge#3 109.71,23.673 r180 top
SB23 "Solderbridge" Solderbridge#4 122.41,19.863 r0 top
SB24 "Solderbridge" Solderbridge#2 122.41,21.133 r0 top
SB25 "Solderbridge" Solderbridge#4 122.41,22.403 r0 top
SB26 "Solderbridge" Solderbridge#1 77.724,8.788 r180 top
SB27 "Solderbridge" Solderbridge_Shorted#2 85.158,17.856 r180 top net-tie
SB28 "Solderbridge" Solderbridge_Shorted#3 85.158,19.685 r180 top net-tie
SB29 "Solderbridge" Solderbridge_Shorted#1 82.211,21.887 r270 top net-tie
SB30 "Solderbridge" Solderbridge_Shorted#4 80.484,18.491 r0 top net-tie
SB31 "Solderbridge" Solderbridge#2 95.148,3.759 r270 top
SB32 "Solderbridge" Solderbridge#1 67.259,27.457 r90 top
SB33 "Solderbridge" Solderbridge_Shorted#1 65.989,27.457 r270 top net-tie
SB34 "Solderbridge" Solderbridge#2 16.716,14.986 r180 top
SB35 "Solderbridge" Solderbridge#3 16.713,13.716 r180 top
SB36 "Solderbridge" Solderbridge#2 16.716,12.446 r180 top
SB37 "Solderbridge" Solderbridge#4 30.144,15.992 r180 top
SB38 "Solderbridge" Solderbridge_Shorted#1 48.387,10.744 r90 top net-tie
SB39 "Solderbridge" Solderbridge#1 24.562,16.688 r270 top
SB40 "Solderbridge" Solderbridge_Shorted#1 14.91,43.025 r270 top net-tie
SB41 "Solderbridge" Solderbridge_Shorted#1 14.91,51.13 r270 top net-tie
SB42 "Solderbridge" Solderbridge_Shorted#1 78.308,18.423 r0 top net-tie
SB43 "Solderbridge" Solderbridge#4 78.283,17.12 r0 top
SB44 "Solderbridge" Solderbridge#3 78.283,19.727 r0 top
SB45 "Solderbridge" Solderbridge#3 78.283,21.031 r0 top
SB46 "Solderbridge" Solderbridge#1 76.53,15.9 r180 top
SB47 "Solderbridge" Solderbridge#2 8.611,62.408 r180 top
SB48 "Solderbridge" Solderbridge#5 29.261,30.124 r270 top
SB50 "Solderbridge" Solderbridge_Shorted#1 71.12,17.856 r180 top net-tie
SB51 "Solderbridge" Solderbridge_Shorted#1 71.12,19.685 r180 top net-tie
SB52 "Solderbridge" Solderbridge_Shorted#1 68.174,21.887 r270 top net-tie
SB53 "Solderbridge" Solderbridge_Shorted#1 66.446,18.491 r0 top net-tie
SB54 "Solderbridge" Solderbridge_Shorted#1 64.287,17.856 r180 top net-tie
SB55 "Solderbridge" Solderbridge_Shorted#1 64.287,19.71 r180 top net-tie
SB56 "Solderbridge" Solderbridge_Shorted#1 61.138,21.895 r270 top net-tie
SB57 "Solderbridge" Solderbridge_Shorted#1 59.182,18.491 r0 top net-tie
SB58 "Solderbridge" Solderbridge_Shorted#1 24.917,6.706 r180 top net-tie
SB59 "Solderbridge" Solderbridge#1 84.755,41.275 r180 top
SB60 "Solderbridge" Solderbridge_Shorted#1 84.785,43.18 r180 top net-tie
SB80 "Solderbridge" Solderbridge#6 105.715,44.78 r90 top
SB81 "Solderbridge" Solderbridge#4 50.724,40.513 r270 top
SW1 "PB SW" Switch-PB-6.2x6.3mm-SMD 110.581,13.83 r0 top locked
SW2 "PB SW" Switch-PB-6.2x6.3mm-SMD 120.842,13.83 r0 top locked
SW3 "PB SW" Switch-PB-6.2x6.3mm-SMD 110.581,4.502 r180 top locked
SW4 "PB SW" Switch-PB-6.2x6.3mm-SMD 120.842,4.502 r180 top locked
SW5 "PB SW" Switch-PB-6.2x6.3mm-SMD 73.609,4.502 r180 top
SW6 "CAS-220TA" CAS-220TA 89.829,5.29 r0 top
SW7 "Switch" CAS-D20A 52.321,19.41 r0 top
SW8 "MK-22D14-G2" MK-22D14-G2 5.528,5.359 r0 top
SW9 "JS203011JCQN" Switch-Slide-J-Lead-DP3T-13x3.5mm 23.749,38.506 r0 top locked
SW10 "CAS-220TA" CAS-220TA 20.625,4.064 r180 top
TP1 "Ø1.5mm,SMD" TP_SMD_Ø1.5mm 54.051,16.84 r90 bottom
TP2 "Ø1.5mm,SMD" TP_SMD_Ø1.5mm 65.758,24.144 r0 bottom
TP3 "Ø1.5mm,SMD" TP_SMD_Ø1.5mm 69.266,14.554 r90 bottom
TP4 "Ø1.5mm,SMD" TP_SMD_Ø1.5mm 68.758,24.144 r0 bottom
TP5 "Ø1.5mm,SMD" TP_SMD_Ø1.5mm 57.658,16.84 r90 bottom
TP6 "Ø1.5mm,SMD" TP_SMD_Ø1.5mm 62.758,24.144 r0 bottom
TP7 "Ø1.5mm,SMD" TP_SMD_Ø1.5mm 59.758,24.206 r0 bottom
TP8 "Ø1.5mm,SMD" TP_SMD_Ø1.5mm 56.758,24.206 r0 bottom
TP9 "Ø1.5mm,SMD" TP_SMD_Ø1.5mm 36.601,35.408 r90 bottom
TP10 "Ø1.5mm,SMD" TP_SMD_Ø1.5mm 31.75,35.408 r90 bottom
TP11 "Ø1.5mm,SMD" TP_SMD_Ø1.5mm 1.346,45.923 r90 bottom
TP12 "Ø1.5mm,SMD" TP_SMD_Ø1.5mm 1.321,48.923 r90 bottom
TP13 "Ø1.5mm,SMD" TP_SMD_Ø1.5mm 109.347,50.578 r180 bottom
TP14 "Ø1.5mm,SMD" TP_SMD_Ø1.5mm 109.347,53.857 r180 bottom
TP15 "Ø1.5mm,SMD" TP_SMD_Ø1.5mm 106.347,53.857 r180 bottom
TP16 "Ø1.5mm,SMD" TP_SMD_Ø1.5mm 103.347,53.857 r180 bottom
TP17 "Ø1.5mm,SMD" TP_SMD_Ø1.5mm 101.656,15.799 r270 bottom
TP18 "Ø1.5mm,SMD" TP_SMD_Ø1.5mm 104.656,15.799 r270 bottom
TP19 "Ø1.0mm,SMD" TP_SMD_Ø1.0mm 62.484,27.94 r90 top
TP20 "Ø1.5mm,SMD" TP_SMD_Ø1.5mm 61.087,38.656 r180 bottom
TP21 "Ø1.5mm,SMD" TP_SMD_Ø1.5mm 61.087,41.656 r180 bottom
TP22 "Ø1.5mm,SMD" TP_SMD_Ø1.5mm 117.373,50.597 r180 bottom
TP23 "Ø1.5mm,SMD" TP_SMD_Ø1.5mm 58.087,38.656 r180 bottom
TP24 "Ø1.5mm,SMD" TP_SMD_Ø1.5mm 5.867,45.923 r180 bottom
TP25 "Ø1.5mm,SMD" TP_SMD_Ø1.5mm 5.867,48.923 r180 bottom
TP26 "Ø1.5mm,SMD" TP_SMD_Ø1.5mm 5.283,15.932 r180 bottom
TP27 "Ø1.5mm,SMD" TP_SMD_Ø1.5mm 16.408,9.931 r180 bottom
TP28 "Ø1.5mm,SMD" TP_SMD_Ø1.5mm 11.532,9.931 r180 bottom
TP29 "Ø1.0mm,SMD" TP_SMD_Ø1.0mm 22.352,16.383 r0 top
TP30 "Ø1.5mm,SMD" TP_SMD_Ø1.5mm 26.06,9.931 r270 bottom
TP31 "Ø1.5mm,SMD" TP_SMD_Ø1.5mm 5.283,12.932 r90 bottom
TP32 "Ø1.5mm,SMD" TP_SMD_Ø1.5mm 5.283,9.931 r180 bottom
TP33 "Ø1.0mm,SMD" TP_SMD_Ø1.0mm 31.496,37.338 r0 top
TP34 "Ø1.0mm,SMD" TP_SMD_Ø1.0mm 28.702,17.78 r0 top
TP35 "Ø1.5mm,SMD" TP_SMD_Ø1.5mm 32.309,15.316 r180 bottom
TP36 "Ø1.0mm,SMD" TP_SMD_Ø1.0mm 69.215,38.1 r0 top
TP37 "Ø1.5mm,SMD" TP_SMD_Ø1.5mm 72.266,14.554 r180 bottom
TP38 "Ø1.5mm,SMD" TP_SMD_Ø1.5mm 107.467,43.713 r180 bottom
TP39 "Ø1.5mm,SMD" TP_SMD_Ø1.5mm 69.469,40.005 r180 bottom
TP40 "TP" TESTPAD-TH 125.095,60.96 r0 top
TP41 "TP" TESTPAD-TH 97.993,3.226 r0 top
TP42 "Ø1.5mm,SMD" TP_SMD_Ø1.5mm 92.656,15.799 r180 bottom
TP43 "Ø1.5mm,SMD" TP_SMD_Ø1.5mm 92.656,18.799 r180 bottom
TP44 "Ø1.5mm,SMD" TP_SMD_Ø1.5mm 95.656,15.799 r180 bottom
TP45 "Ø1.5mm,SMD" TP_SMD_Ø1.5mm 95.656,18.799 r180 bottom
TP46 "Ø1.5mm,SMD" TP_SMD_Ø1.5mm 98.656,15.799 r180 bottom
TP47 "Ø1.5mm,SMD" TP_SMD_Ø1.5mm 98.656,18.799 r180 bottom
TP48 "Ø1.5mm,SMD" TP_SMD_Ø1.5mm 61.087,44.656 r180 bottom
TP54 "Ø1.5mm,SMD" TP_SMD_Ø1.5mm 80.718,15.799 r180 bottom
TP55 "Ø1.5mm,SMD" TP_SMD_Ø1.5mm 83.718,15.799 r180 bottom
TP56 "Ø1.5mm,SMD" TP_SMD_Ø1.5mm 83.718,18.799 r180 bottom
TP57 "Ø1.5mm,SMD" TP_SMD_Ø1.5mm 80.718,18.799 r180 bottom
U1 "nRF5340-QKAA" AQFN40P700X700X85_HS-99N 116.078,37.389 r0 top locked
U2 "nRF5340-QKAA" AQFN40P700X700X85_HS-99N 44.576,30.048 r0 top
U3 "FSA2466UMX" XQFN40P180X260X50-16N 68.766,19.091 r180 top
U4 "TCK106AG" BGA4C40P2X2_76X76X62 118.999,51.892 r180 top
U5 "FSA2466UMX" XQFN40P180X260X50-16N 61.747,19.091 r180 top
U6 "FSA2466UMX" XQFN40P180X260X50-16N 75.785,19.091 r180 top
U7 "MX25R6435F" SON127P600X80_HS-9N 116.06,21.768 r180 top locked
U9 "TS27L2IPT" TSOP65P640X120-8N 24.943,25.781 r0 top
U10 "XC9131" "10-USPB (2.9x2.6)" 12.344,26.264 r180 top
U11 "XC9236" USP-6C 20.726,20.218 r0 top
U12 "TCK106AG" BGA4C40P2X2_76X76X62 25.578,17.882 r180 top
U13 "TCK106AG" BGA4C40P2X2_76X76X62 20.498,15.977 r0 top
U14 "TCK106AG" BGA4C40P2X2_76X76X62 23.317,17.882 r180 top
U15 "TCK106AG" BGA4C40P2X2_76X76X62 53.34,40.919 r270 top
U16 "74LVC1G08" SOT65P210X100-5N 26.416,14.605 r180 top
U17 "TCK106AG" BGA4C40P2X2_76X76X62 20.498,14.567 r0 top
U18 "74LVC1G11" SOT65P210X100-6N 18.821,10.414 r270 top
U19 "TCK106AG" BGA4C40P2X2_76X76X62 30.119,17.186 r180 top
U20 "TCK106AG" BGA4C40P2X2_76X76X62 107.163,45.542 r90 top
U21 "74LVC1G11" SOT65P210X100-6N 21.666,10.414 r270 top
U22 "TCK106AG" BGA4C40P2X2_76X76X62 27.483,30.353 r270 top
U23 "TCK106AG" BGA4C40P2X2_76X76X62 20.498,13.157 r0 top
U24 "74LVC1G08" SOT65P210X100-5N 24.511,10.414 r90 top
U25 "FSA2466UMX" XQFN40P180X260X50-16N 82.804,19.091 r180 top
X1 "32MHz" BT-XTAL_2016 123.203,41.243 r90 top
X2 "32.768kHz" XTAL_2012 109.528,34.914 r0 top
X3 "32MHz" BT-XTAL_2016 51.701,33.903 r90 top

## Footprints (in the part's own frame and the unit in brackets; to place one, negate y for a bottom-side part, rotate by r counter-clockwise, add the part's x,y. Pads: shape width x height; smd on the part's side, far side on the other; paste and mask are expansions set on the pad)
"10-USPB (2.9x2.6)" [mm] "PQFN, 10-Leads, Body 2.60x2.90mm, Pitch 0.50mm, Thermal Pad 1.60x2.50mm, IPC Medium Density"
  rect 0.45x0.475 smd paste-0.088 mask+0.05: 1(-1.27,1.15) 2(-1.27,0.5) 9(1.27,0.5) 10(1.27,1.15)
  rect 0.45x0.25 smd paste-0.05 mask+0.07: 3(-1.27,-0.15) 4(-1.27,-0.65) 5(-1.27,-1.15) 6(1.27,-1.15) 7(1.27,-0.65) 8(1.27,-0.15)
  rect 1.6x2.5 smd paste-5: 11(0,0)
  silkscreen extent -1.95,-1.53 1.35,2.1, body extent -1.3,-1.45 1.3,1.45, height 0.6
AQFN40P700X700X85_HS-99N [mm] "AQFN, 98-Leads, Body 7.00x7.00mm, Pitch 0.40mm, Thermal Pad 5.4x5.0mm, IPC Medium Density"
  rect 5.4x5 smd paste-5 mask+0.05: 104(0.2,0)
  round 0.4 smd paste+0.012 mask+0.05: A1(-3.2,3.2) A31(3.2,3.2) AL1(-3.2,-3.2) AL31(3.2,-3.2)
  round 0.225 smd paste+0.012 mask+0.05: A5(-2.2,3.2) A13(-0.6,3.2) A15(-0.2,3.2) A17(0.2,3.2) A19(0.6,3.2) A21(1,3.2) A23(1.4,3.2) A25(1.8,3.2) A27(2.2,3.2) AA1(-3.2,-1) AA31(3.2,-1) AB2(-2.8,-1.2) AC1(-3.2,-1.4) AC31(3.2,-1.4) AD2(-2.8,-1.6) AE1(-3.2,-1.8) AE31(3.2,-1.8) AF2(-2.8,-2) AG1(-3.2,-2.2) AG31(3.2,-2.2) AH2(-2.8,-2.4) AJ1(-3.2,-2.6) AJ31(3.2,-2.6) AK2(-2.8,-2.8) AK4(-2.4,-2.8) AK6(-2,-2.8) AK8(-1.6,-2.8) AK10(-1.2,-2.8) AK12(-0.8,-2.8) AK14(-0.4,-2.8) AK16(0,-2.8) AK18(0.4,-2.8) AK20(0.8,-2.8) AK22(1.2,-2.8) AK24(1.6,-2.8) AK26(2,-2.8) AK28(2.4,-2.8) AK30(2.8,-2.8) AL3(-2.6,-3.2) AL5(-2.2,-3.2) AL7(-1.8,-3.2) AL9(-1.4,-3.2) AL11(-1,-3.2) AL13(-0.6,-3.2) AL15(-0.2,-3.2) AL17(0.2,-3.2) AL19(0.6,-3.2) AL21(1,-3.2) AL23(1.4,-3.2) AL25(1.8,-3.2) AL27(2.2,-3.2) AL29(2.6,-3.2) B2(-2.8,2.8) B4(-2.4,2.8) B6(-2,2.8) B8(-1.6,2.8) B10(-1.2,2.8) B12(-0.8,2.8) B14(-0.4,2.8) B16(0,2.8) B18(0.4,2.8) B20(0.8,2.8) B22(1.2,2.8) B24(1.6,2.8) B26(2,2.8) B28(2.4,2.8) B30(2.8,2.8) C1(-3.2,2.6) C31(3.2,2.6) D2(-2.8,2.4) E1(-3.2,2.2) E31(3.2,2.2) F2(-2.8,2) G1(-3.2,1.8) G31(3.2,1.8) H2(-2.8,1.6) J1(-3.2,1.4) J31(3.2,1.4) K2(-2.8,1.2) L1(-3.2,1) L31(3.2,1) M2(-2.8,0.8) N1(-3.2,0.6) N31(3.2,0.6) P2(-2.8,0.4) R1(-3.2,0.2) R31(3.2,0.2) T2(-2.8,0) U1(-3.2,-0.2) U31(3.2,-0.2) V2(-2.8,-0.4) W1(-3.2,-0.6) W31(3.2,-0.6) Y2(-2.8,-0.8)
  rrect15% 1.1x1 on Top Paste: ""(-1.75,-1.8) ""(-1.75,-0.6) ""(-1.75,0.6) ""(-1.75,1.8) ""(-0.45,-1.8) ""(-0.45,-0.6) ""(-0.45,0.6) ""(-0.45,1.8) ""(0.85,-1.8) ""(0.85,-0.6) ""(0.85,0.6) ""(0.85,1.8) ""(2.15,-1.8) ""(2.15,-0.6) ""(2.15,0.6) ""(2.15,1.8)
  silkscreen extent -4.22,-3.6 3.6,3.6, body extent -3.5,-3.5 3.5,3.5, height 0.85
BGA4C40P2X2_76X76X62 [mm] "BGA, 4-Leads, Body 0.8x0.8mm,  Pitch 0.40mm"
  round 0.235 smd mask+0.05: A1(-0.2,0.2) A2(0.2,0.2) B1(-0.2,-0.2) B2(0.2,-0.2)
  silkscreen extent -0.74,-0.45 0.45,0.74, body extent -0.38,-0.38 0.38,0.38, height 0.63
BT-XTAL_2016 [mm] "Crystal 2.0 x 1.6 mm"
  rect 0.95x0.85 smd: 1(-0.725,-0.575) 2(0.725,-0.575) 3(0.725,0.575) 4(-0.725,0.575)
  silkscreen extent -1.08,-0.88 1.08,0.88, body extent -1.05,-0.85 1.05,0.85, height 0.56
CAPC0603X03L_C#1 [mm] "Chip Capacitor, 2-Leads, Body 0.6x0.3mm, IPC High Density"
  rect 0.27x0.3 smd mask+0.05: 1(-0.285,0) 2(0.285,0)
  silkscreen extent -0.49,-0.22 0.49,0.22, body extent -0.3,-0.15 0.31,0.15, height 0.3
CAPC0603X03L_C#2 [mm] "Chip Capacitor, 2-Leads, Body 0.6x0.3mm, IPC High Density"
  rect 0.27x0.3 smd: 1(-0.285,0) 2(0.285,0)
  silkscreen extent -0.49,-0.22 0.49,0.22, body extent -0.3,-0.15 0.31,0.15, height 0.3
CAPC0603X03L_C_NC [mm] "Chip Capacitor, 2-Leads, Body 0.6x0.3mm, IPC High Density"
  rect 0.27x0.3 smd mask+0.05: 1(-0.285,0) 2(0.285,0)
  silkscreen extent -0.49,-0.22 0.49,0.22
CAPC1005X04L [mm] "Chip Capacitor, 2-Leads, Body 1.0x0.5mm, IPC High Density"
  rect 0.6x0.5 smd: 1(-0.5,0) 2(0.5,0)
  silkscreen extent -0.9,-0.35 0.9,0.35, body extent -0.51,-0.25 0.51,0.25, height 0.5
CAPC1608X06L [mm] "Chip Capacitor, 2-Leads, Body 1.6x0.8mm, IPC High Density"
  rect 0.75x0.8 smd: 1(-0.675,0) 2(0.675,0)
  silkscreen extent -1.17,-0.5 1.17,0.5, body extent -0.8,-0.43 0.8,0.43, height 0.8
CAS-220TA [mm] "SLIDE SWITCH DPDT J HOOK"
  rect 1x1.6 smd: 1(-1.75,-1.85) 2(0,-1.85) 3(1.75,-1.85) 4(-1.75,1.85) 5(0,1.85) 6(1.75,1.85)
  silkscreen extent -2.8,-2.6 2.7,2, body extent -2.7,-2.15 2.7,2.16, height 2.51
CAS-D20A [mm] "SLIDE SWITCH 2xSPDT J HOOK"
  rect 1x1.6 smd: 1(-1.75,-1.85) 2(0,-1.85) 3(1.75,-1.85) 4(-1.75,1.85) 5(0,1.85) 6(1.75,1.85)
  silkscreen extent -2.84,-2.62 2.7,2, body extent -2.7,-2.27 2.7,2.28, height 2.5
COAXIAL-SWF [mm]
  rect 0.5x0.58 smd: 1(0,1.16) 3(0,-1.16)
  rect 0.75x0.8 smd: 2(-1.025,-0.95) 2(-1.025,0.95) 2(1.025,-0.95) 2(1.025,0.95)
  Top Layer pour cut-out: 0.65,-0.55 -0.65,-0.55 -0.65,-1.35 0.65,-1.35
  Top Layer pour cut-out: -0.65,0.55 0.65,0.55 0.65,1.35 -0.65,1.35
  silkscreen extent -1.25,-1.25 1.25,1.25, body extent -1.26,-1.3 1.26,1.3, height 1.55
DFN65P100X40-3L [mm] "DFN, 3-Leads, Body 0.60x1.00mm, Pitch 0.65mm, IPC High Density"
  rect 0.4x0.25 smd mask+0.05: 1(-0.35,0.225) 2(-0.35,-0.225)
  rect 0.4x0.7 smd mask+0.065: 3(0.35,0)
  silkscreen extent -0.58,0.58 -0.48,0.67, body extent -0.53,-0.33 0.53,0.33, height 0.4
DFN65P200X200X80_HS-6N [mm] "DFN, 6-Leads, Body 2.00x2.00mm, Pitch 0.65mm, IPC Medium Density"
  rect 0.45x0.42 smd mask+0.055: 1(-0.905,0.65) 2(-0.905,0) 3(-0.905,-0.65) 4(0.905,-0.65) 5(0.905,0) 6(0.905,0.65)
  rect 0.92x0.71 smd mask+0.055: 3(0,-0.475) 6(0,0.475)
  silkscreen extent -1.6,-1.08 1.08,1.08, body extent -1.02,-1.02 1.02,1.02, height 0.8
DO-216AA [mm]
  rect 0.762x1.27 smd: 1(1.65,0)
  rect 2.67x2.54 smd: 3(-0.7,0)
  silkscreen extent -1.6,-1.05 0.7,1.05, body extent -1.9,-1 1.95,1, height 1.01
Fiducial [mm] "Fiducial Mark"
  round 1 smd paste+0 mask+0.5: 0(0,0)
  round 1 smd far side paste+0 mask+0.5: 0(0,0)
  Top Layer keep-out circle w0.01: c0,0 r1
  Bottom Layer keep-out circle w0.01: c0,0 r1
FPC_05P-0.5mm-RA-SMD [mm] "FPC, 5-Leads, Pitch 0,5mm"
  rect 0.6x2.6 smd: 0(-0.9,-2.3) 0(2.9,-2.3)
  rect 0.3x0.8 smd mask+0.05: 1(0,0) 2(0.5,0) 3(1,0) 4(1.5,0) 5(2,0)
  silkscreen extent -1.45,-3.85 3.45,0, body extent -1.3,-3.85 3.3,0.2, height 1.2
HDR_2x3-SMD [mil] "Board-Board Conn, Header, 6-way, 2-row"
  rect 50x150 smd: 1(-100,-87.5) 2(-100,87.5) 3(0,-87.5) 4(0,87.5) 5(100,-87.5) 6(100,87.5)
  silkscreen extent -160,-140 150,100, body extent -150,-148 150,148, height 382
HDR_2x5-SMD-1.27mm-K [mm] "SMT MICRO HEADER, (1,27) .050\" Keying Shroud"
  rect 0.76x2.4 smd: 1(-2.54,-1.95) 2(-2.54,1.95) 3(-1.27,-1.95) 4(-1.27,1.95) 5(0,-1.95) 6(0,1.95) 7(1.27,-1.95) 8(1.27,1.95) 9(2.54,-1.95) 10(2.54,1.95)
  silkscreen extent -3.17,-3.15 3.17,3.15, body extent -3.14,-2.92 3.14,2.92, height 6.11
HDR_2x6-NC [mm] "Pin Header, 2.54mm through hole"
  rect 1.5x1.5 hole 0.9: 1(-6.35,-1.27)
  round 1.5 hole 0.9: 2(-6.35,1.27) 3(-3.81,-1.27) 4(-3.81,1.27) 5(-1.27,-1.27) 6(-1.27,1.27) 7(1.27,-1.27) 8(1.27,1.27) 9(3.81,-1.27) 10(3.81,1.27) 11(6.35,-1.27) 12(6.35,1.27)
  silkscreen extent -7.62,-2.54 7.62,2.54
HDR_2x8-NC [mm] "Pin Header, 2.54mm through hole"
  rect 1.5x1.5 hole 0.9: 1(-8.89,-1.27)
  round 1.5 hole 0.9: 2(-8.89,1.27) 3(-6.35,-1.27) 4(-6.35,1.27) 5(-3.81,-1.27) 6(-3.81,1.27) 7(-1.27,-1.27) 8(-1.27,1.27) 9(1.27,-1.27) 10(1.27,1.27) 11(3.81,-1.27) 12(3.81,1.27) 13(6.35,-1.27) 14(6.35,1.27) 15(8.89,-1.27) 16(8.89,1.27)
  silkscreen extent -10.16,-2.54 10.16,2.54
HDR_2x10-NC [mm] "Pin Header, 2.54mm through hole"
  rect 1.5x1.5 hole 0.9: 1(-11.43,-1.27)
  round 1.5 hole 0.9: 2(-11.43,1.27) 3(-8.89,-1.27) 4(-8.89,1.27) 5(-6.35,-1.27) 6(-6.35,1.27) 7(-3.81,-1.27) 8(-3.81,1.27) 9(-1.27,-1.27) 10(-1.27,1.27) 11(1.27,-1.27) 12(1.27,1.27) 13(3.81,-1.27) 14(3.81,1.27) 15(6.35,-1.27) 16(6.35,1.27) 17(8.89,-1.27) 18(8.89,1.27) 19(11.43,-1.27) 20(11.43,1.27)
  silkscreen extent -12.7,-2.54 12.7,2.54
HDR_2x10-SMD-1.27mm-NC [mm] "SMT MICRO HEADER, (1,27) .050\""
  rect 0.76x2.4 smd: 1(-5.715,-1.95) 2(-5.715,1.95) 3(-4.445,-1.95) 4(-4.445,1.95) 5(-3.175,-1.95) 6(-3.175,1.95) 7(-1.905,-1.95) 8(-1.905,1.95) 9(-0.635,-1.95) 10(-0.635,1.95) 11(0.635,-1.95) 12(0.635,1.95) 13(1.905,-1.95) 14(1.905,1.95) 15(3.175,-1.95) 16(3.175,1.95) 17(4.445,-1.95) 18(4.445,1.95) 19(5.715,-1.95) 20(5.715,1.95)
  silkscreen extent -6.35,-3.15 6.35,3.15
INDC0603X03L_C [mm] "Chip Inductor, 2-Leads, Body 0.6x0.3mm, IPC High Density"
  rect 0.27x0.3 smd: 1(-0.285,0) 2(0.285,0)
  silkscreen extent -0.49,-0.22 0.49,0.22, body extent -0.31,-0.16 0.31,0.16, height 0.26
INDC1005X04L [mm] "Chip Inductor, 2-Leads, Body 1.0x0.5mm, IPC High Density"
  rect 0.65x0.5 smd: 1(-0.475,0) 2(0.475,0)
  silkscreen extent -0.9,-0.35 0.9,0.35, body extent -0.5,-0.3 0.5,0.3, height 0.5
INDC1608X06L [mm] "Chip Inductor, 2-Leads, Body 1.6x0.8mm, IPC High Density"
  rect 0.75x0.8 smd: 1(-0.675,0) 2(0.675,0)
  silkscreen extent -1.17,-0.5 1.17,0.5, body extent -0.8,-0.48 0.8,0.48, height 0.8
L-KLS5-CR2032-23-B1 [mm] "SMT,CR2032 Coin Battery Holder"
  rect 3.2x4.2 smd: 1(-14.65,0) 2(14.65,0)
  silkscreen extent -14.42,-8 14.42,8, body extent -15.7,-8 15.85,8, height 5.17
LED_0603_G [mil] "SMD Super Bright LED, GREEN"
  rect 30x32 smd: 1(-27.5,0) 2(27.5,0)
  silkscreen extent -58,-20 48,20, body extent -32,-16 32,16, height 24
LIST_1x2-NC [mm] "Pin List, 2.54mm through hole"
  rect 1.5x1.5 hole 0.9: 1(-1.27,0)
  round 1.5 hole 0.9: 2(1.27,0)
  silkscreen extent -2.54,-1.27 2.54,1.27
LIST_1x3-NC [mm] "Pin List, 2.54mm through hole"
  rect 1.5x1.5 hole 0.9: 1(-2.54,0)
  round 1.5 hole 0.9: 2(0,0) 3(2.54,0)
  silkscreen extent -3.81,-1.27 3.81,1.27
LIST_1x6_SMD-NC [mm] "Pin List, 2.54mm, SMD"
  rect 1.02x2.19 smd paste+0: 1(0,-1.465) 1(0,1.465) 2(2.54,-1.465) 2(2.54,1.465) 3(5.08,-1.465) 3(5.08,1.465) 4(7.62,-1.465) 4(7.62,1.465) 5(10.16,-1.465) 5(10.16,1.465) 6(12.7,-1.465) 6(12.7,1.465)
  silkscreen extent -1.27,-1.27 13.97,1.27
LIST_1x8_SMD-NC [mm] "Pin List, 2.54mm, SMD"
  rect 1.02x2.19 smd paste+0: 1(0,-1.465) 1(0,1.465) 2(2.54,-1.465) 2(2.54,1.465) 3(5.08,-1.465) 3(5.08,1.465) 4(7.62,-1.465) 4(7.62,1.465) 5(10.16,-1.465) 5(10.16,1.465) 6(12.7,-1.465) 6(12.7,1.465) 7(15.24,-1.465) 7(15.24,1.465) 8(17.78,-1.465) 8(17.78,1.465)
  silkscreen extent -1.27,-1.27 19.05,1.27
LIST_1x10_SMD-NC [mm] "Pin List, 2.54mm, SMD"
  rect 1.02x2.19 smd paste+0: 1(0,-1.465) 1(0,1.465) 2(2.54,-1.465) 2(2.54,1.465) 3(5.08,-1.465) 3(5.08,1.465) 4(7.62,-1.465) 4(7.62,1.465) 5(10.16,-1.465) 5(10.16,1.465) 6(12.7,-1.465) 6(12.7,1.465) 7(15.24,-1.465) 7(15.24,1.465) 8(17.78,-1.465) 8(17.78,1.465) 9(20.32,-1.465) 9(20.32,1.465) 10(22.86,-1.465) 10(22.86,1.465)
  silkscreen extent -1.27,-1.27 24.13,1.27
LIST_1x13_SMD [mm] "Pin List, 2.54mm, SMD"
  rect 1.02x2.19 smd: 1(0,-1.465) 1(0,1.465) 2(2.54,-1.465) 2(2.54,1.465) 3(5.08,-1.465) 3(5.08,1.465) 4(7.62,-1.465) 4(7.62,1.465) 5(10.16,-1.465) 5(10.16,1.465) 6(12.7,-1.465) 6(12.7,1.465) 7(15.24,-1.465) 7(15.24,1.465) 8(17.78,-1.465) 8(17.78,1.465) 9(20.32,-1.465) 9(20.32,1.465) 10(22.86,-1.465) 10(22.86,1.465) 11(25.4,-1.465) 11(25.4,1.465) 12(27.94,-1.465) 12(27.94,1.465) 13(30.48,-1.465) 13(30.48,1.465)
  silkscreen extent -1.27,-1.27 31.75,1.27, body extent -1.27,-2.5 31.75,2.5, height 9.82
LIST_1x13_SMD-NC [mm] "Pin List, 2.54mm, SMD"
  rect 1.02x2.19 smd: 1(0,-1.465) 1(0,1.465) 2(2.54,-1.465) 2(2.54,1.465) 3(5.08,-1.465) 3(5.08,1.465) 4(7.62,-1.465) 4(7.62,1.465) 5(10.16,-1.465) 5(10.16,1.465) 6(12.7,-1.465) 6(12.7,1.465) 7(15.24,-1.465) 7(15.24,1.465) 8(17.78,-1.465) 8(17.78,1.465) 9(20.32,-1.465) 9(20.32,1.465) 10(22.86,-1.465) 10(22.86,1.465) 11(25.4,-1.465) 11(25.4,1.465) 12(27.94,-1.465) 12(27.94,1.465) 13(30.48,-1.465) 13(30.48,1.465)
  silkscreen extent -1.27,-1.27 31.75,1.27
LIST_ANG_1x2-SMD-2.54MM [mm] "Pin List, 2.54mm, Surface Mount, Angled"
  round 1.78 hole 1.78 unplated: 0(0,-4.496)
  rect 1.27x3.18 smd: 1(-1.27,0) 2(1.27,0)
  silkscreen extent -2.54,-11.58 2.54,-1.8, body extent -2.56,-11.61 2.52,1.35, height 3.03
MK-22D14-G2 [mm] "Slide Switches - DPDT, SMD, ON-ON"
  rect 1x1.5 smd: 1(2.5,-3.5) 2(0,-3.5) 3(-2.5,-3.5) 4(2.5,3.5) 5(0,3.5) 6(-2.5,3.5)
  silkscreen extent -4.5,-4.75 4.5,2.75, body extent -4.25,-3.75 4.25,2.5, height 3.5
PMCPB5530X [mm] "QFN, 6-Leads, Body 2.00x2.00mm, Pitch 0.65mm, IPC Medium Density"
  rect 0.3x0.35 smd mask+0.05: 1(-0.875,0.65) 2(-0.875,0) 3(-0.875,-0.65) 4(0.875,-0.65) 5(0.875,0) 6(0.875,0.65)
  rect 1.05x0.72 smd mask+0.05: 3(0,-0.49) 6(0,0.49)
  silkscreen extent -1.62,1.02 -1.37,1.27, body extent -1.05,-1.05 1.05,1.05, height 0.65
RESC0603X03L_C#1 [mm] "Chip Resistor, 2-Leads, Body 0.6x0.3mm, IPC High Density"
  rect 0.27x0.3 smd: 1(-0.285,0) 2(0.285,0)
  silkscreen extent -0.49,-0.22 0.49,0.22, body extent -0.3,-0.15 0.3,0.15, height 0.23
RESC0603X03L_C#2 [mm] "Chip Resistor, 2-Leads, Body 0.6x0.3mm, IPC High Density"
  rect 0.27x0.3 smd mask+0.08: 1(-0.285,0) 2(0.285,0)
  silkscreen extent -0.49,-0.22 0.49,0.22, body extent -0.3,-0.15 0.3,0.15, height 0.23
RESC0603X03L_C_NC [mm] "Chip Resistor, 2-Leads, Body 0.6x0.3mm, IPC High Density"
  rect 0.27x0.3 smd: 1(-0.285,0) 2(0.285,0)
  silkscreen extent -0.49,-0.22 0.49,0.22
RESC1005X04L_NC [mm] "Chip Resistor, 2-Leads, Body 1.0x0.5mm, IPC High Density"
  rect 0.6x0.55 smd mask+0.05: 1(-0.5,0) 2(0.5,0)
  silkscreen extent -0.87,-0.38 0.88,0.38
SM02B-SRSS-TB [mm] "JST, SH connector, side entry SMD, 1mm pitch"
  rect 1.2x1.8 smd: 0(-2.1,-3.875) 0(2.1,-3.875)
  rect 0.6x1.55 smd: 1(-0.5,0) 2(0.5,0)
  silkscreen extent -2,-4.57 2,-0.33, body extent -1.99,-4.58 1.99,0.41, height 3
SOCKET_1x6_SMD [mm] "Socket, 2.54mm, SMD"
  rect 1.02x2.19 smd: 1(0,-1.465) 1(0,1.465) 2(2.54,-1.465) 2(2.54,1.465) 3(5.08,-1.465) 3(5.08,1.465) 4(7.62,-1.465) 4(7.62,1.465) 5(10.16,-1.465) 5(10.16,1.465) 6(12.7,1.465) 6(12.7,-1.465)
  silkscreen extent -1.27,-1.27 13.97,1.27, body extent -1.27,-2.29 13.97,2.29, height 7.47
SOCKET_1x8_SMD [mm] "Socket, 2.54mm, SMD"
  rect 1.02x2.19 smd: 1(0,-1.465) 1(0,1.465) 2(2.54,-1.465) 2(2.54,1.465) 3(5.08,-1.465) 3(5.08,1.465) 4(7.62,-1.465) 4(7.62,1.465) 5(10.16,-1.465) 5(10.16,1.465) 6(12.7,1.465) 6(12.7,-1.465) 7(15.24,-1.465) 7(15.24,1.465) 8(17.78,-1.465) 8(17.78,1.465)
  silkscreen extent -1.27,-1.27 19.05,1.27, body extent -1.27,-2.29 19.05,2.29, height 7.47
SOCKET_1x10_SMD [mm] "Socket, 2.54mm, SMD"
  rect 1.02x2.19 smd: 1(0,1.465) 1(0,-1.465) 2(2.54,-1.465) 2(2.54,1.465) 3(5.08,-1.465) 3(5.08,1.465) 4(7.62,-1.465) 4(7.62,1.465) 5(10.16,-1.465) 5(10.16,1.465) 6(12.7,-1.465) 6(12.7,1.465) 7(15.24,-1.465) 7(15.24,1.465) 8(17.78,-1.465) 8(17.78,1.465) 9(20.32,-1.465) 9(20.32,1.465) 10(22.86,-1.465) 10(22.86,1.465)
  silkscreen extent -1.27,-1.27 24.13,1.27, body extent -1.27,-2.29 24.13,2.29, height 7.47
SOCKET_2x3_SMD-2.54mm-bottom-NC [mm] "Socket, 2.54mm, SMD"
  rect 1.02x2.22 smd far side: 1(-2.54,-2.825) 2(-2.54,2.825) 3(0,-2.825) 4(0,2.825) 5(2.54,-2.825) 6(2.54,2.825)
SOCKET_2x10_SMD-2.54mm [mil] "CONN HEADER VERT DUAL 20POS SMD - FEMALE HEADER, PCB, 0.1\", 10+10WAY"
  rect 50x150 smd: 1(-450,-87.5) 2(-450,87.5) 3(-350,-87.5) 4(-350,87.5) 5(-250,-87.5) 6(-250,87.5) 7(-150,-87.5) 8(-150,87.5) 9(-50,-87.5) 10(-50,87.5) 11(50,-87.5) 12(50,87.5) 13(150,-87.5) 14(150,87.5) 15(250,-87.5) 16(250,87.5) 17(350,-87.5) 18(350,87.5) 19(450,-87.5) 20(450,87.5)
  silkscreen extent -510,-140 500,100, body extent -500,-138 500,139, height 290
SODFL100X40-2N [mm] "SODFL, 2-Leads, Body 0.60x1.00mm, IPC Medium Density"
  rect 0.36x0.25 smd: 1(-0.42,0) 2(0.42,0)
  silkscreen extent -0.7,-0.35 0.5,0.5, body extent -0.5,-0.33 0.5,0.33, height 0.4
Solderbridge#1 [mm]
  round 0.2 smd paste-10: 1(-0.312,0) 2(0.312,0)
  Top Layer region: 0.077,0.432 0.152,0.505 0.271,0.467 0.335,0.424 0.409,0.351 0.462,0.292 0.521,0.193 0.549,0.099 0.544,-0.122 0.518,-0.193 0.434,-0.33 0.351,-0.411 0.259,-0.469 0.157,-0.5 0.107,-0.483 0.077,-0.43
  Top Layer region: -0.077,-0.432 -0.152,-0.505 -0.271,-0.467 -0.335,-0.424 -0.409,-0.351 -0.462,-0.292 -0.521,-0.193 -0.549,-0.099 -0.544,0.122 -0.518,0.193 -0.434,0.33 -0.351,0.411 -0.259,0.469 -0.157,0.5 -0.107,0.483 -0.077,0.43
  Top Layer lines w0.152: 0.153,0.431 cw(c0.042,0) 0.153,-0.431 ; -0.153,0.431 ccw(c-0.042,0) -0.153,-0.431
Solderbridge#2 [mm]
  round 0.2 smd paste-10: 1(-0.312,0) 2(0.312,0)
  Top Layer region: 0.077,0.432 0.152,0.505 0.271,0.467 0.335,0.424 0.409,0.351 0.462,0.292 0.521,0.193 0.549,0.099 0.544,-0.122 0.518,-0.193 0.434,-0.33 0.351,-0.411 0.259,-0.469 0.157,-0.5 0.107,-0.483 0.077,-0.43
  Top Layer region: -0.077,-0.432 -0.152,-0.505 -0.271,-0.467 -0.335,-0.424 -0.409,-0.351 -0.462,-0.292 -0.521,-0.193 -0.549,-0.099 -0.544,0.122 -0.518,0.193 -0.434,0.33 -0.351,0.411 -0.259,0.469 -0.157,0.5 -0.107,0.483 -0.077,0.43
  Top Layer lines w0.152: -0.153,0.431 ccw(c-0.042,0) -0.487,0 ccw(c-0.042,0) -0.153,-0.431 ; 0.153,0.431 cw(c0.042,0) 0.153,-0.431
Solderbridge#3 [mm]
  round 0.2 smd paste-10: 1(-0.312,0) 2(0.312,0)
  Top Layer region: 0.077,0.432 0.152,0.505 0.271,0.467 0.335,0.424 0.409,0.351 0.462,0.292 0.521,0.193 0.549,0.099 0.544,-0.122 0.518,-0.193 0.434,-0.33 0.351,-0.411 0.259,-0.469 0.157,-0.5 0.107,-0.483 0.077,-0.43
  Top Layer region: -0.077,-0.432 -0.152,-0.505 -0.271,-0.467 -0.335,-0.424 -0.409,-0.351 -0.462,-0.292 -0.521,-0.193 -0.549,-0.099 -0.544,0.122 -0.518,0.193 -0.434,0.33 -0.351,0.411 -0.259,0.469 -0.157,0.5 -0.107,0.483 -0.077,0.43
  Top Layer lines w0.152: 0.153,0.431 cw(c0.042,0) 0.312,0.353 cw(c0.042,0) 0.312,-0.353 cw(c0.042,0) 0.153,-0.431 ; -0.153,0.431 ccw(c-0.042,0) -0.312,0.353 ccw(c-0.042,0) -0.153,-0.431